# Allegro board s68_v10.brd
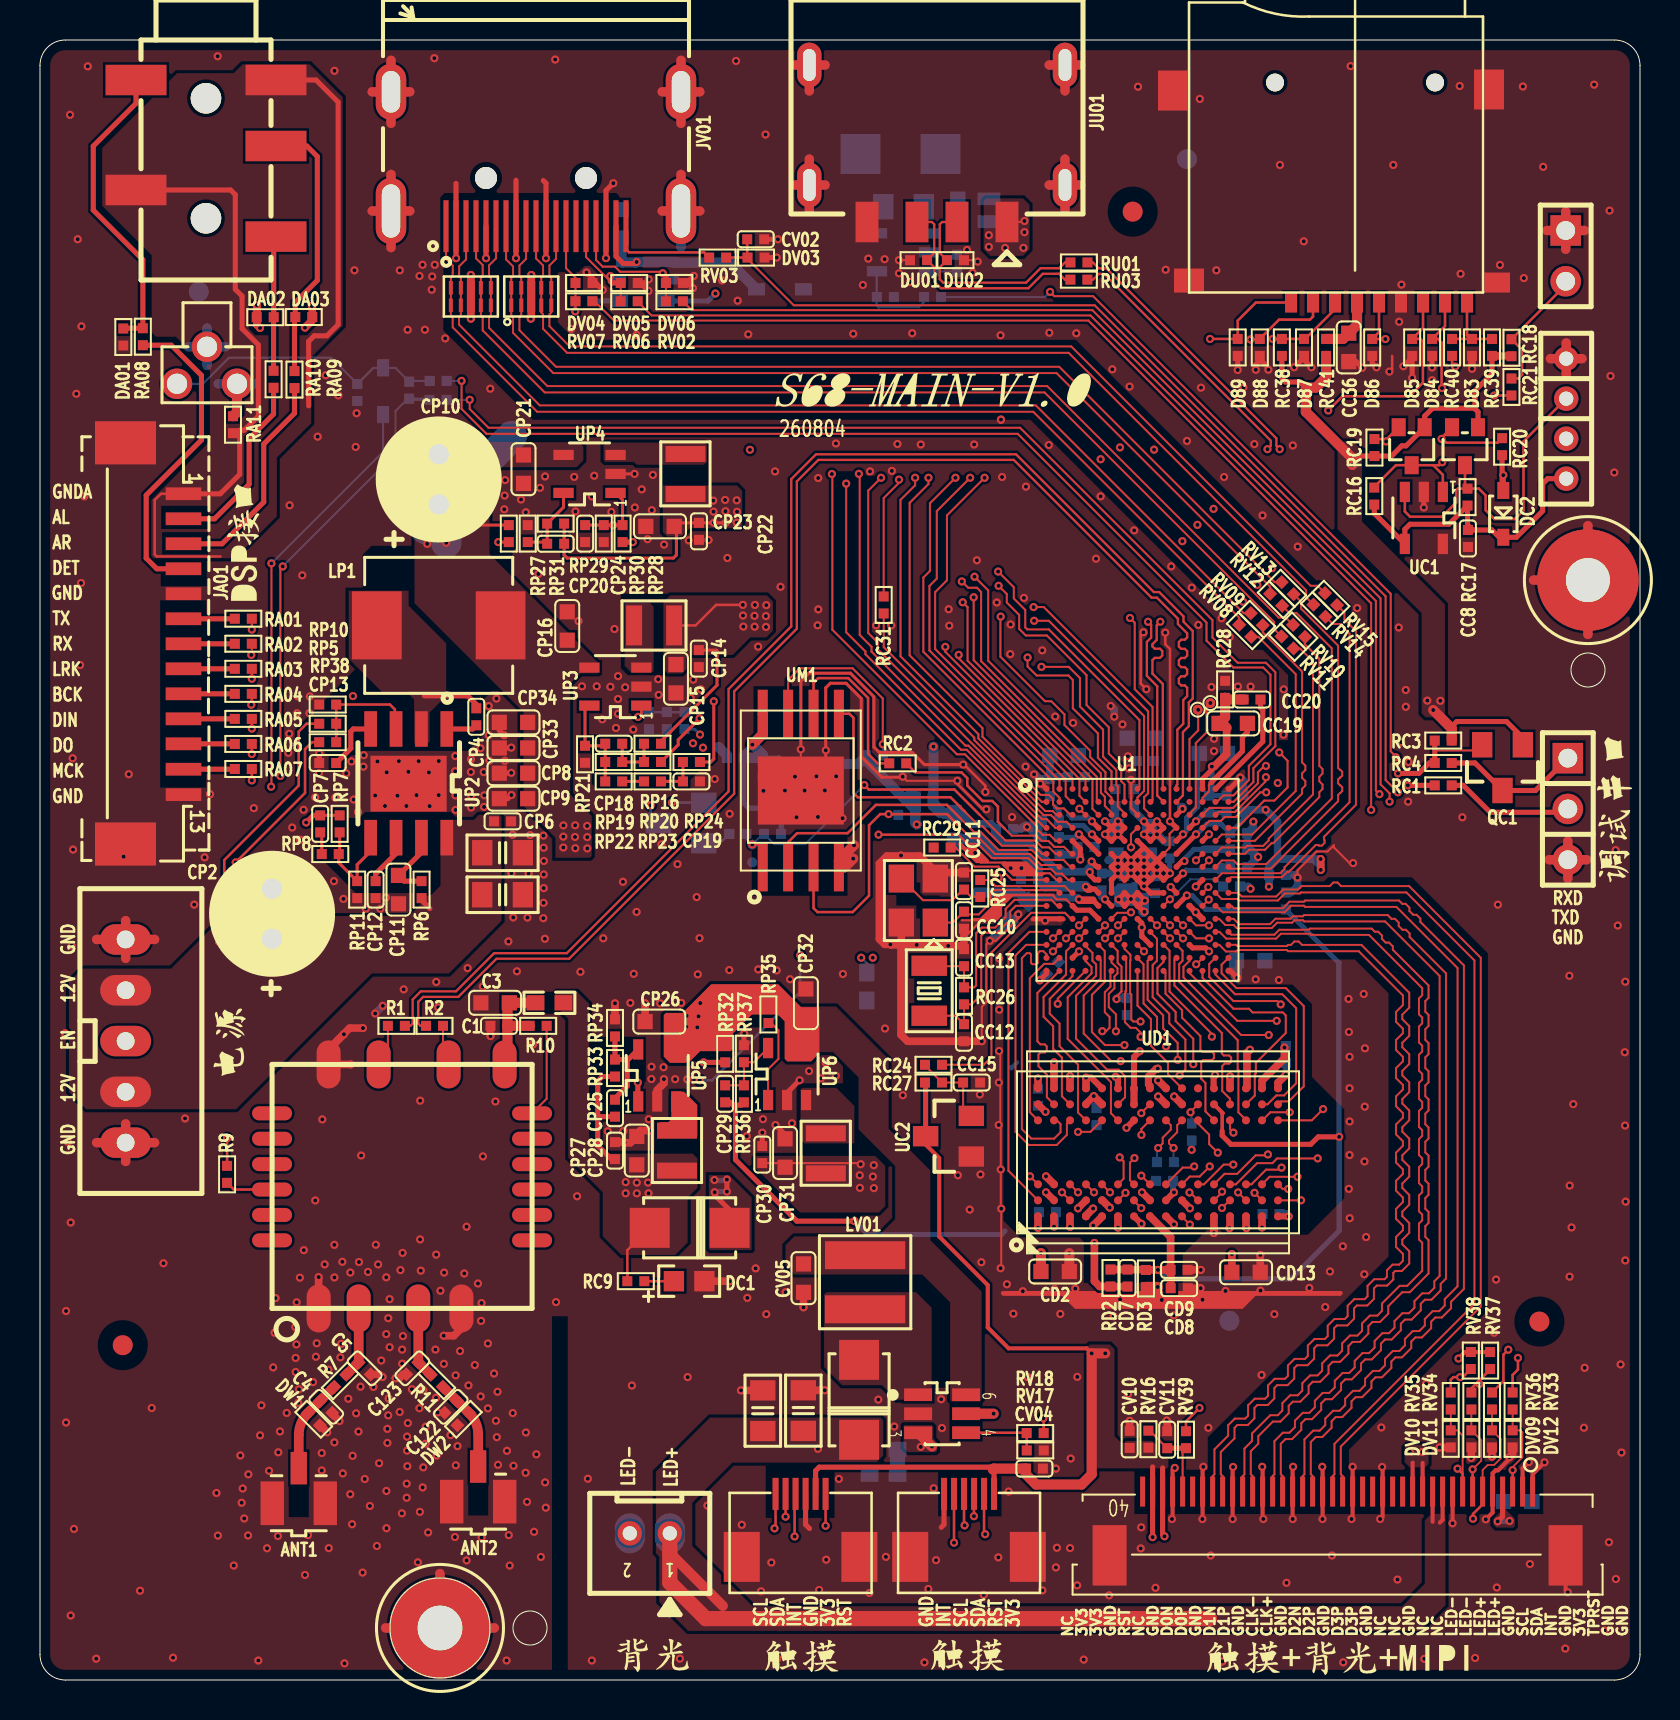
[diagram p0: board, top side]
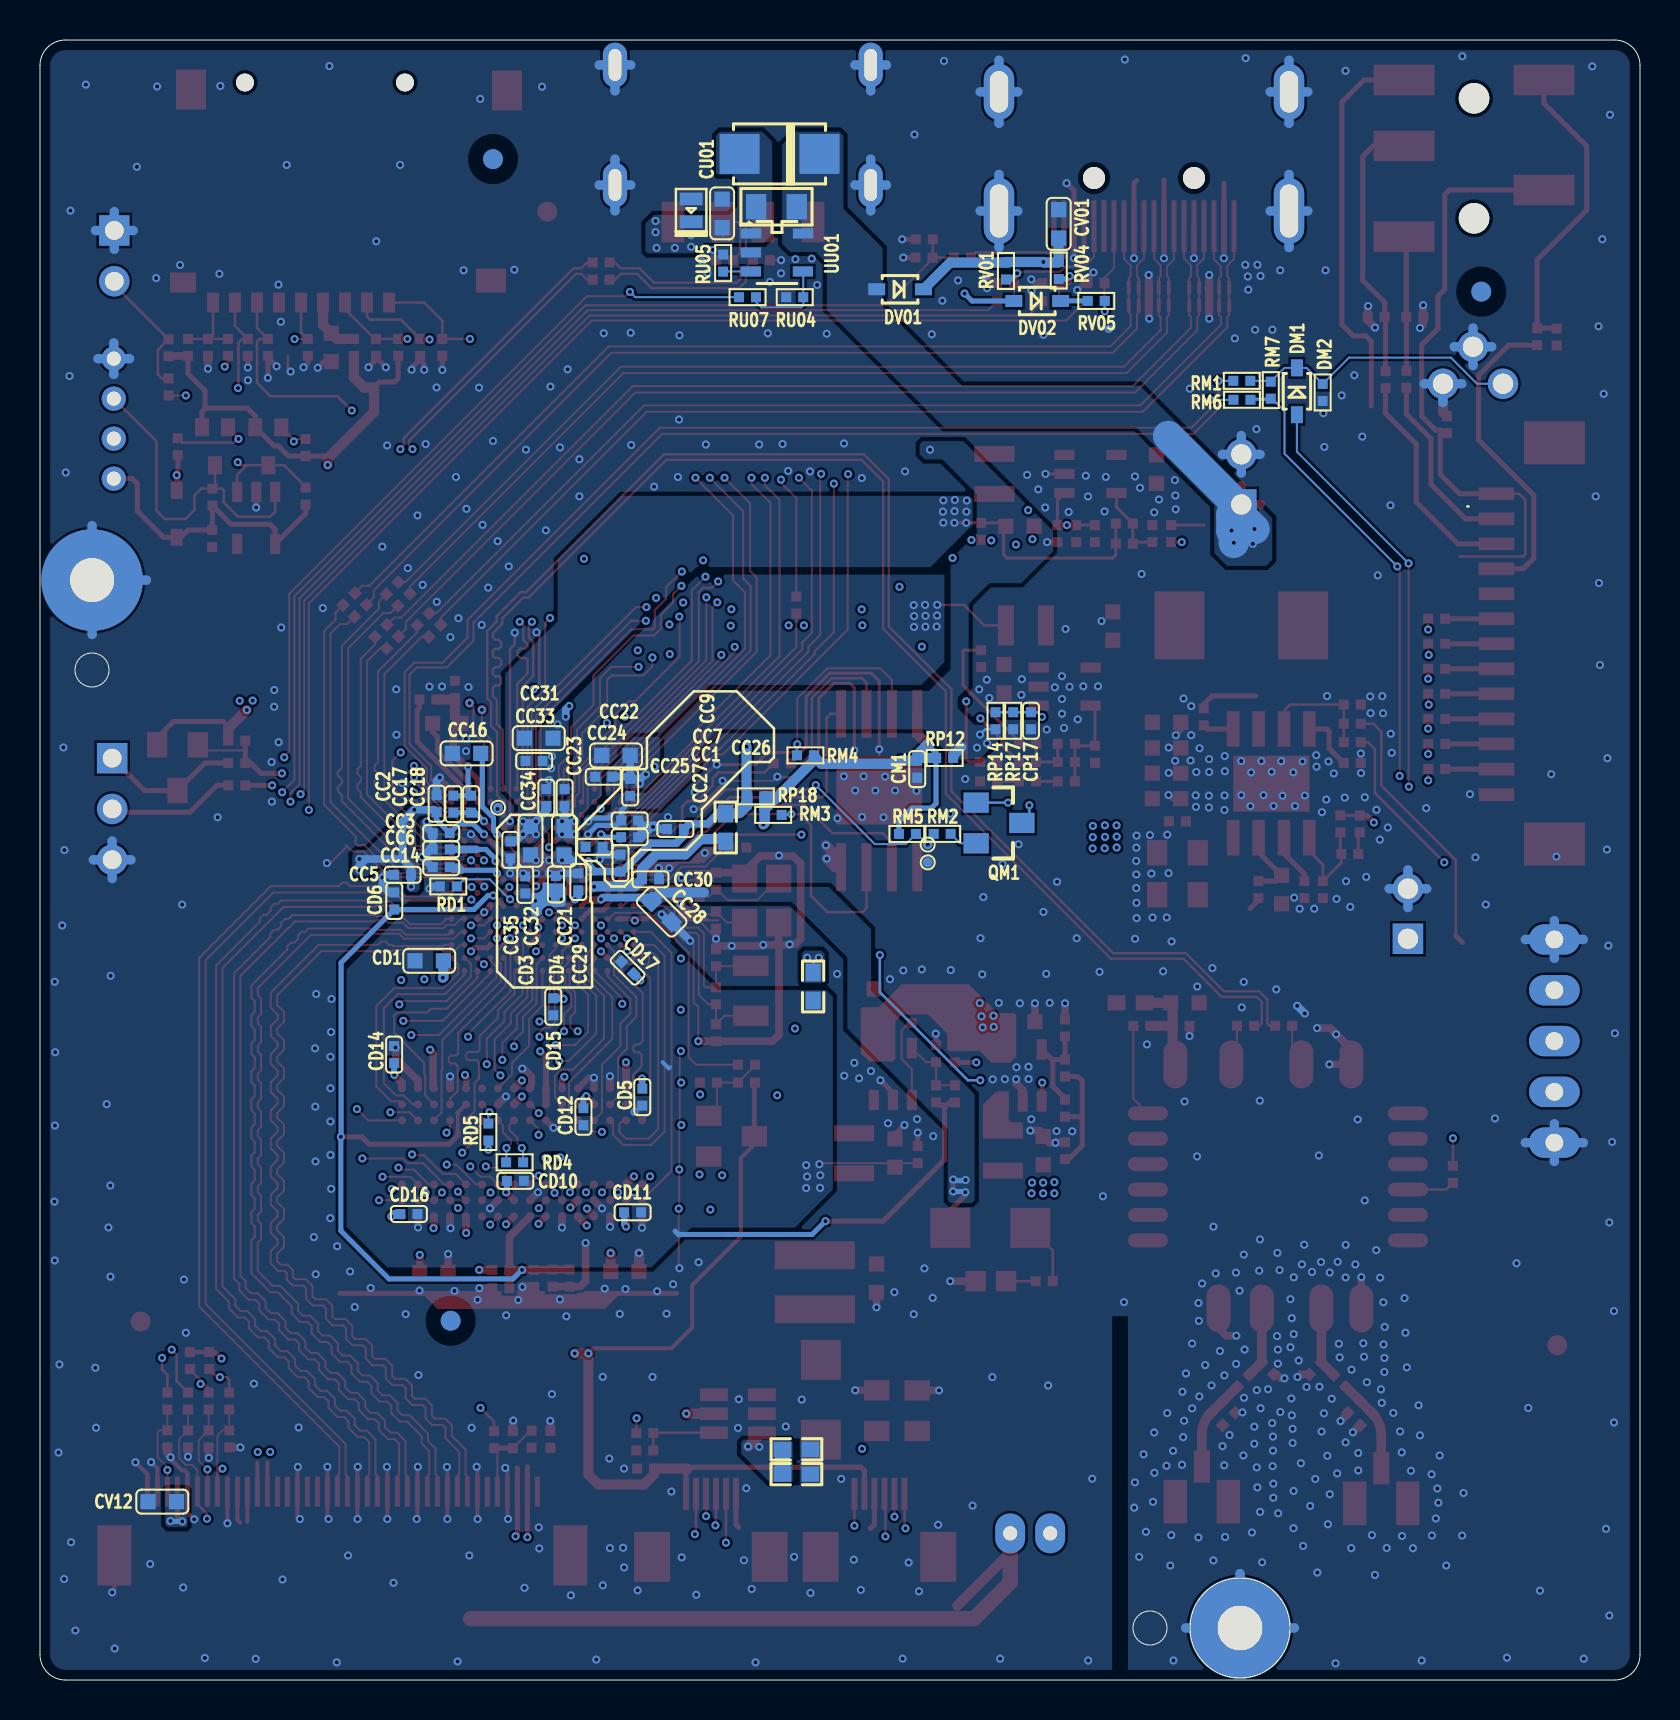
[diagram p1: board, bottom side, seen from below]

Outline 80 x 82 mm; copper layers: TOP, GND, VDD, BOTTOM. Coordinates in mm from the lower left corner of the outline.
Outline path: circle c20,2.6 r1.1 ; circle c20,2.6 r2.5 ; circle c24.5,2.6 r0.85 ; circle c77.4,50.5 r0.85 ; 0,80.73 0,1.27 arc(0.37,0.37) 1.27,0 78.73,0 arc(79.63,0.37) 80,1.27 80,80.73 arc(79.63,81.63) 78.73,82 1.27,82 arc(0.37,81.63) 0,80.73

## Design rules (mm)
net group HTX0N: nets HTX0N TX_D0N
net group HTX0P: nets HTX0P TX_D0P
net group HTX1N: nets HTX1N TX_D1N
net group HTX1P: nets HTX1P TX_D1P
net group HTX2N: nets HTX2N TX_D2N
net group HTX2P: nets HTX2P TX_D2P
net group HTXCN: nets HTXCN TX_CKN
net group HTXCP: nets HTXCP TX_CKP
net group PC2: nets PC2 SPI0-CLK
net group SCK: nets SCKN SCKP
net group SDC0-CLK: nets N23805182 SDC0-CLK
net group USB0-DM: nets USB0-DM USB_DM0_C
net group USB0-DP: nets USB0-DP USB_DP0_C
net group CMD-CLK-500MIL: nets SA0 SA1 SA2 SA3 SA4 SA5 SA6 SA7 SA8 SA9 SA10 SA11 SA12 SA13 SA14 SA15 SBA0 SBA1 SBA2 SCAS SRAS SWE
net group CS-CLK-300MIL: nets SCS0
net group DATA0-250MIL: nets SDQ0 SDQ1 SDQ2 SDQ3 SDQ4 SDQ5 SDQ6 SDQ7 SDQM0 SDQS0N SDQS0P
net group DATA1-250MIL: nets SDQ8 SDQ9 SDQ10 SDQ11 SDQ12 SDQ13 SDQ14 SDQ15 SDQM1 SDQS1N SDQS1P
net group EMMC: nets SPI0-CS0 SPI0-HOLD SPI0-MISO SPI0-MOSI SPI0-WP

## Placement (name value [footprint] x y rotation side)
ANT1  COX-3_A  [HSCOX-AMC-TM-A]  12.94 8.84 0 top
ANT2  COX-3_A  [HSCOX-AMC-TM-A]  21.91 8.92 0 top
C1  100nF  [C0402]  22.95 32.71 0 top
C3  10uF/10V  [C0603]  22.75 33.86 0 top
C4  NC  [C0402]  14.31 13.66 135 top
C5  NC  [C0402]  16.23 15.58 135 top
C122  NC  [C0402]  20.53 13.66 45 top
C123  NC  [C0402]  18.61 15.58 45 top
CC1  100nF  [C0402]  50.52 42.14 0 bottom
CC2  1uF/10V  [C0402]  60.17 43.82 270 bottom
CC3  100nF  [C0402]  59.94 42.34 180 bottom
CC5  100nF  [C0402]  61.87 40.26 180 bottom
CC6  100nF  [C0402]  59.94 41.53 180 bottom
CC7  100nF  [C0402]  50.52 42.98 180 bottom
CC8  100nF  [C0402]  71.4 57.08 90 top
CC9  100nF  [C0402]  50.49 44.63 90 bottom
CC10  18pF  [C0402]  46.2 37.99 270 top
CC11  18pF  [C0402]  46.2 39.95 90 top
CC12  22pF  [C0402]  46.2 32.36 270 top
CC13  22pF  [C0402]  46.2 36.11 90 top
CC14  100nF  [C0402]  59.94 40.64 0 bottom
CC15  1nF  [C0402]  46.58 29.87 0 top
CC16  10uF/10V  [C0603]  58.67 46.33 0 bottom
CC17  2.2uF/6.3V  [C0402]  59.33 43.79 90 bottom
CC18  NC  [C0402]  58.44 43.79 90 bottom
CC19  10uF/10V  [C0603]  59.66 47.83 180 top
CC20  470nF  [C0402]  60.6 49.02 180 top
CC21  10uF/10V  [C0603]  53.8 41.96 90 bottom
CC22  NC 10uF/10V  [C0603]  51.2 46.23 0 bottom
CC23  2.2uF/6.3V  [C0402]  53.77 44.12 270 bottom
CC24  2.2nF  [C0402]  51.81 45.16 0 bottom
CC25  2.2uF/6.3V  [C0402]  52.3 41.66 0 bottom
CC26  100nF  [C0402]  48.23 42.55 180 bottom
CC27  100nF  [C0402]  50.97 40.85 90 bottom
CC28  10uF/10V  [C0603]  48.92 38.41 225 bottom
CC29  2.2uF/6.3V  [C0402]  53.08 39.91 90 bottom
CC30  2.2uF/6.3V  [C0402]  49.48 40.03 180 bottom
CC31  10uF/10V  [C0603]  55.06 47.09 0 bottom
CC32  10uF/10V  [C0603]  55.48 41.96 90 bottom
CC33  100nF  [C0402]  55.29 45.95 0 bottom
CC34  2.2uF/6.3V  [C0402]  54.69 44.12 270 bottom
CC35  2.2uF/6.3V  [C0402]  56.48 41.51 90 bottom
CC36  10uF/10V  [C0603]  65.44 66.63 90 top
CD1  10uF/10V  [C0603]  60.54 35.96 0 bottom
CD2  NC 10uF/10V  [C0603]  50.76 20.42 180 top
CD3  2.2nF  [C0402]  55.74 39.76 270 bottom
CD4  2.2uF/6.3V  [C0402]  54.21 39.78 270 bottom
CD5  2.2uF/6.3V  [C0402]  49.88 29.14 270 bottom
CD6  100nF  [C0402]  62.28 38.95 270 bottom
CD7  NC  [C0402]  54.38 20.1 270 top
CD8  100nF  [C0402]  56.96 19.59 180 top
CD9  100nF  [C0402]  56.95 20.51 180 top
CD10  100nF  [C0402]  56.23 24.96 180 bottom
CD11  1uF/10V  [C0402]  50.37 23.38 180 bottom
CD12  100nF  [C0402]  52.83 28.16 270 bottom
CD13  10uF/10V  [C0603]  60.3 20.39 180 top
CD14  1uF/10V  [C0402]  62.29 31.27 90 bottom
CD15  100nF  [C0402]  54.33 33.66 270 bottom
CD16  100nF  [C0402]  61.56 23.3 180 bottom
CD17  100nF  [C0402]  50.62 35.61 45 bottom
CM1  100nF  [C0402]  36.14 45.54 90 bottom
CP1  NC 10uF/25V  [C0805]  23.13 39.26 0 top
CP2  220uF/25V  [CAP-RAD-6D3X11-2D5]  11.6 37.06 90 top
CP4  100nF  [C0402]  21.82 48.16 270 top
CP5  10uF/25V  [C0805]  23.13 41.36 0 top
CP6  100nF  [C0402]  23.13 42.93 180 top
CP7  6.8nF  [C0402]  14.01 42.81 90 top
CP8  10uF/10V  [C0603]  23.67 45.34 180 top
CP9  10uF/10V  [C0603]  23.67 44.06 180 top
CP10  470uF/10V  [CAP-RAD-6D3X11-2D5]  19.94 58.78 90 top
CP11  1uF/25V  [C0603]  17.92 39.52 90 top
CP12  1uF/10V  [C0402]  16.78 39.52 90 top
CP13  100nF  [C0402]  14.39 45.85 0 top
CP14  100nF  [C0402]  32.94 51.07 270 top
CP15  10uF/10V  [C0603]  31.8 50.06 270 top
CP16  10uF/10V  [C0603]  26.36 52.7 90 top
CP17  100nF  [C0402]  30.45 47.96 270 bottom
CP18  20pF  [C0402]  28.69 46.81 0 top
CP19  100nF  [C0402]  32.57 44.93 0 top
CP20  20pF  [C0402]  25.78 56.81 0 top
CP21  10uF/10V  [C0603]  24.17 60.54 270 top
CP22  100nF  [C0402]  32.95 57.43 270 top
CP23  10uF/10V  [C0603]  31 57.68 180 top
CP24  100nF  [C0402]  27.26 57.32 270 top
CP25  20pF  [C0402]  28.75 28.59 270 top
CP26  10uF/10V  [C0603]  30.96 32.92 180 top
CP27  100nF  [C0402]  28.75 26.47 90 top
CP28  10uF/10V  [C0603]  29.84 26.47 90 top
CP29  20pF  [C0402]  34.26 29.31 270 top
CP30  100nF  [C0402]  36.11 26.27 90 top
CP31  10uF/10V  [C0603]  37.25 26.35 90 top
CP32  10uF/10V  [C0603]  38.29 33.84 90 top
CP33  NC 10uF/10V  [C0603]  23.67 46.6 180 top
CP34  NC 10uF/10V  [C0603]  23.67 47.88 180 top
CU01  10uF/10V  [C0603]  45.89 73.33 90 bottom
CV01  10uF/10V  [C0603]  29.07 72.81 90 bottom
CV02  100nF  [C0402]  35.79 72.04 0 top
CV04  100nF  [C0402]  49.72 10.57 180 top
CV05  10uF/10V  [C0603]  38.18 20.09 270 top
CV06  2.2uF/50V  [C0805]  36.14 13.46 90 top
CV07  NC 2.2uF/50V  [C0805]  38.17 13.47 90 top
CV10  1uF/10V  [C0402]  54.48 12.03 90 top
CV11  100nF  [C0402]  56.36 12.02 90 top
CV12  NC 10uF/6.3V  [C0603]  73.89 8.92 0 bottom
D83  TPD1E05U06  [ESD0402]  71.6 66.63 270 top
D84  TPD1E05U06  [ESD0402]  69.61 66.63 270 top
D85  TPD1E05U06  [ESD0402]  68.61 66.63 270 top
D86  TPD1E05U06  [ESD0402]  66.61 66.63 270 top
D87  TPD1E05U06  [ESD0402]  63.2 66.63 270 top
D88  TPD1E05U06  [ESD0402]  60.99 66.63 270 top
D89  TPD1E05U06  [ESD0402]  59.88 66.63 270 top
D134  SS14  [DO-214AC]  40.95 14.01 270 top
DA01  CLAMP0521P  [ESD0402]  4.16 67.15 270 top
DA02  CLAMP0521P  [ESD0402]  11.26 68.14 180 top
DA03  CLAMP0521P  [ESD0402]  13.19 68.15 0 top
DC1  GRN LED  [LED0603]  31.7 19.94 0 top
DC2  B5819WS  [SOD_323]  73.17 58.31 270 top
DM1  B5819WS  [SOD_323]  17.15 64.44 90 bottom
DM2  NC CLAMP0521P  [ESD0402]  15.87 64.38 270 bottom
DP1  SS14  [DO-214AC]  43.02 76.3 180 bottom
DP2  1N4001  [DO-214AC]  32.48 22.61 0 top
DU01  CLAMP0521P  [ESD0402]  43.93 70.99 180 top
DU02  CLAMP0521P  [ESD0402]  45.77 70.99 0 top
DU07  WPE5V0N16AT1L1  [DFN1610-2L]  47.44 73.48 90 bottom
DV01  B5819WS  [SOD_323]  37 69.53 180 bottom
DV02  B5819WS  [SOD_323]  30.14 68.95 180 bottom
DV03  NC CLAMP0521P  [ESD0402]  35.8 71.12 0 top
DV04  NC CLAMP0521P  [ESD0402]  27.2 69.85 0 top
DV05  NC CLAMP0521P  [ESD0402]  29.46 69.85 0 top
DV06  NC CLAMP0521P  [ESD0402]  31.72 69.85 0 top
DV07  NC CLAMP3324PN  [DFN2510P10]  21.54 69.17 0 top
DV08  NC CLAMP3324PN  [DFN2510P10]  24.56 69.17 0 top
DV09  NC CLAMP0521P  [ESD0402]  72.6 12.06 270 top
DV10  NC CLAMP0521P  [ESD0402]  70.54 12.06 270 top
DV11  NC CLAMP0521P  [ESD0402]  71.57 12.06 270 top
DV12  NC CLAMP0521P  [ESD0402]  73.63 12.06 270 top
DW1  CLAMP0521P  [ESD0402]  13.69 13.04 315 top
DW2  CLAMP0521P  [ESD0402]  21.17 13.04 225 top
J50  TF  [T-FLASH-A]  57.45 69.37 0 top
JA01  -  [A1251WRA-S-13P]  7.17 59.31 270 top
JA02  LF-313  [PJ-327F]  8.3 76.09 0 top
JC1  NC SIP3  [SIP3]  76.39 43.55 270 top
JC4  NC SIP4  [SIP4_2D0]  76.31 62.07 90 top
JC5  NC XH-02A  [SIP2]  76.29 72.48 270 top
JP1  CON5  [XH-05A]  4.28 34.49 270 top
JU01  USB-SMD-4MNT  [USB_A_SMT_4MNT]  48.35 72.9 180 top
JV01  WLDM-068E  [WBC0119-20R-A]  34.96 88.01 180 top
JV02  FPC-40  [FPC40_PT05_H2B]  64.88 9.28 180 top
JV03  NC PH-02A  [PH-02A]  31.49 7.33 180 top
JV04  NC AFC24-S06FIA-00  [FPC6R_1X6_0R50_DUALCN]  54.95 6.46 180 top
JV05  NC AFC24-S06FIA-00  [FPC6R_1X6_0R50_DUALCN]  46.53 6.46 180 top
K1  TS-1109G  [MINI-DIP-KEY-H]  8.35 64.81 180 top
LP1  SCCB0630-4R7M  [SPL0707G]  19.94 52.73 0 top
LP2  SKFB252010-2R2M  [L2520]  30.71 52.73 0 top
LP3  SKFB252010-2R2M  [L2520]  32.27 60.3 270 top
LP4  SKFB252010-2R2M  [L2520]  31.85 26.47 270 top
LP5  SKFB252010-2R2M  [L2520]  39.29 26.33 270 top
LV01  MWSA0402-100MT  [SPL0404B]  41.26 19.89 270 top
M1  Mark  [MARK]  4.14 16.74 0 top
M2  Mark  [MARK]  54.63 73.42 0 top
M3  Mark  [MARK]  74.97 17.92 0 top
M4  Mark  [MARK]  7.94 69.42 180 bottom
M5  Mark  [MARK]  59.47 17.96 180 bottom
M6  Mark  [MARK]  57.35 76.04 180 bottom
NOREF  -  []  6.57 0 90 top
NOREF#2  -  []  49.65 212.18 0 top
NOREF#3  -  []  30.62 1.25 0 top
NOREF#4  -  []  10.21 57.23 90 top
NOREF#5  -  []  44.52 64.51 0 top
NOREF#6  -  []  46.36 1.21 0 top
NOREF#7  -  []  8.19 30.43 90 top
NOREF#8  -  []  64.83 1.09 0 top
NOREF#9  -  []  0 3.02 0 top
NOREF#10  -  []  38.06 1.15 0 top
NOREF#11  -  []  82.91 40.04 0 top
NOREF#12  -  []  37.9 155.15 0 top
QC1  NC BSN20  [SOT23]  73.13 45.62 180 top
QC4  2SK3018  [SOT_323]  68.58 61.69 180 top
QC5  2SK3018  [SOT_323]  71.25 61.69 180 top
QM1  WPM2341  [SOT23]  32.05 42.85 270 bottom
R1  0R  [R0402]  17.82 32.71 0 top
R2  0R  [R0402]  19.73 32.71 180 top
R7  0R  [R0402]  15.01 14.96 45 top
R9  NC  [R0402]  9.35 25.28 90 top
R10  10K  [R0402]  24.91 32.71 180 top
R11  0R  [R0402]  19.84 14.96 135 top
RA01  33R  [R0402]  10.17 53.06 0 top
RA02  33R  [R0402]  10.17 51.81 0 top
RA03  33R  [R0402]  10.17 50.56 0 top
RA04  33R  [R0402]  10.17 49.31 0 top
RA05  33R  [R0402]  10.17 48.06 0 top
RA06  33R  [R0402]  10.17 46.8 0 top
RA07  33R  [R0402]  10.17 45.55 0 top
RA08  10K  [R0402]  5.14 67.16 90 top
RA09  100R  [R0402]  12.72 65.02 90 top
RA10  100R  [R0402]  11.68 65.04 90 top
RA11  0R  [R0402]  9.65 62.77 90 top
RC1  1K  [R0402]  70.16 44.73 0 top
RC2  33R  [R0402]  42.89 45.83 180 top
RC3  NC 10K  [R0402]  70.16 46.97 180 top
RC4  1K  [R0402]  70.16 45.85 0 top
RC9  1K  [R0402]  29.79 19.94 0 top
RC16  4.7K  [R0402]  66.71 59.2 270 top
RC17  4.7K  [R0402]  71.38 59.14 90 top
RC18  4.7K  [R0402]  73.58 66.61 90 top
RC19  2.2K  [R0402]  66.72 61.62 270 top
RC20  33R  [R0402]  73.11 61.67 270 top
RC21  1K  [R0402]  73.57 64.65 270 top
RC24  0R  [R0402]  44.68 30.76 0 top
RC25  0R  [R0402]  47.01 39.58 270 top
RC26  10M  [R0402]  46.2 34.21 90 top
RC27  47K  [R0402]  44.68 29.87 0 top
RC28  0R  [R0402]  59.25 49.53 270 top
RC29  0R  [R0402]  45.11 41.62 0 top
RC31  33R  [R0402]  42.18 53.75 90 top
RC38  47K  [R0402]  62.09 66.63 90 top
RC39  47K  [R0402]  72.6 66.63 90 top
RC40  1K  [R0402]  70.6 66.63 90 top
RC41  2.2R  [R0402]  64.3 66.63 90 top
RD1  240R/F  [R0402]  59.58 39.68 180 bottom
RD2  NC  [R0402]  53.53 20.1 270 top
RD3  NC  [R0402]  55.3 20.08 90 top
RD4  100R  [R0402]  56.27 25.88 0 bottom
RD5  240R/F  [R0402]  57.58 27.4 90 bottom
RM1  1K  [R0402]  19.91 64.96 0 bottom
RM2  0R  [R0402]  34.89 42.31 180 bottom
RM3  10K  [R0402]  43.34 43.26 180 bottom
RM4  10K  [R0402]  41.73 46.23 0 bottom
RM5  10K  [R0402]  36.63 42.3 180 bottom
RM6  0R  [R0402]  19.9 64.01 180 bottom
RM7  1K  [R0402]  18.46 64.49 90 bottom
RP5  NC 100K  [R0402]  14.39 47.81 0 top
RP6  33R  [R0402]  19.08 39.52 90 top
RP7  115K/F  [R0402]  14.98 42.81 90 top
RP8  1K  [R0402]  14.51 41.3 0 top
RP9  NC  [R0603]  41.34 34.68 270 bottom
RP10  47K  [R0402]  14.39 48.77 180 top
RP11  15K/F  [R0402]  15.86 39.52 90 top
RP12  0R  [R0402]  34.77 46.1 0 bottom
RP13  0R  [R0603]  45.72 42.62 270 bottom
RP14  100K  [R0402]  32.22 47.96 270 bottom
RP16  NC 0R  [R0402]  30.62 46.81 180 top
RP17  100K  [R0402]  31.34 47.96 270 bottom
RP18  NC  [R0402]  44.21 44.18 180 bottom
RP19  13K/F  [R0402]  28.69 45.9 180 top
RP20  0R  [R0402]  30.62 45.9 180 top
RP21  18K/F  [R0402]  27.25 46.29 270 top
RP22  130K/F  [R0402]  28.69 44.93 180 top
RP23  0R  [R0402]  30.62 44.93 180 top
RP24  13K/F  [R0402]  32.57 45.9 180 top
RP26  0R  [R0603]  25.47 33.86 180 top
RP27  NC 100K  [R0402]  23.44 57.32 270 top
RP28  100K  [R0402]  29.13 57.32 270 top
RP29  12K/F  [R0402]  25.78 57.82 180 top
RP30  100K  [R0402]  28.19 57.32 270 top
RP31  20K/F  [R0402]  24.39 57.32 90 top
RP32  100K  [R0402]  34.26 31.31 90 top
RP33  91K/F  [R0402]  28.75 30.6 90 top
RP34  20K/F  [R0402]  28.75 32.6 270 top
RP35  100K  [R0402]  36.42 33.28 90 top
RP36  30K/F  [R0402]  35.2 29.31 90 top
RP37  20K/F  [R0402]  35.2 31.31 270 top
RP38  100K  [R0402]  14.39 46.89 0 top
RU01  2.2R  [R0402]  51.95 70.88 180 top
RU03  2.2R  [R0402]  51.94 70.02 0 top
RU04  47K  [R0402]  42.26 69.14 180 bottom
RU05  3.6K  [R0402]  45.84 70.84 90 bottom
RU07  100R  [R0402]  44.62 69.14 180 bottom
RU16  NC 0R  [R0805]  43.18 73.66 0 bottom
RV01  2K  [R0402]  31.7 70.45 90 bottom
RV02  47R  [R0402]  31.72 68.94 180 top
RV03  10K  [R0402]  33.88 71.12 180 top
RV04  2K  [R0402]  29.06 70.47 90 bottom
RV05  27K  [R0402]  27.19 68.96 0 bottom
RV06  47R  [R0402]  29.46 68.94 0 top
RV07  47R  [R0402]  27.2 68.94 180 top
RV08  2.2R  [R0402]  60.26 52.46 135 top
RV09  2.2R  [R0402]  60.84 53.04 135 top
RV10  2.2R  [R0402]  62.95 52.46 135 top
RV11  2.2R  [R0402]  62.38 51.88 135 top
RV12  2.2R  [R0402]  61.81 54.01 135 top
RV13  2.2R  [R0402]  62.38 54.59 135 top
RV14  2.2R  [R0402]  63.97 53.47 135 top
RV15  2.2R  [R0402]  64.55 54.04 135 top
RV16  NC 100R  [R0402]  55.42 12.04 270 top
RV17  10K  [R0402]  49.76 11.48 180 top
RV18  1K  [R0402]  49.76 12.35 180 top
RV19  NC 2.2R  [R0603]  42.18 10.29 180 bottom
RV20  2.2R  [R0603]  42.18 11.53 180 bottom
RV33  47R  [R0402]  73.63 13.95 270 top
RV34  47R  [R0402]  71.57 13.95 270 top
RV35  47R  [R0402]  70.54 13.95 270 top
RV36  47R  [R0402]  72.6 13.95 270 top
RV37  2K  [R0402]  72.51 15.97 270 top
RV38  2K  [R0402]  71.54 15.97 270 top
RV39  NC 100R  [R0402]  57.3 12.02 90 top
TH1  TESTPOINT  [THO-5D0-2D2D]  20 2.6 0 top
TH2  TESTPOINT  [THO-5D0-2D2D]  77.4 55 0 top
TP1  test  [TP_0R50]  35.61 41.77 180 bottom
TP2  test  [TP_0R50]  35.61 40.88 0 bottom
TP3  test  [TP_0R50]  58.52 48.85 0 top
TP4  test  [TP_0R50]  57.88 48.52 0 top
TP5  test  [TP_0R50]  57.1 43.61 180 bottom
U1  H133-BGA196  [BGA196P65B1000_1000H117]  54.87 40.01 0 top
UC1  BL24C02F  [SOT23-5]  69.19 58.1 180 top
UC2  MAX809S  [SOT23]  45.42 27.19 90 top
UD1  value  [BGA96P80B1000_1400H120]  55.9 26.38 90 top
UM1  NC SPI-NAND-OR-NOR  [SPI-9P-NAND-OR-NOR]  38.04 44.47 90 top
UP2  SY8204  [SOP8H-50-155]  18.44 44.83 180 top
UP3  RY3408/SY8088AAC  [SOT23-5]  28.77 49.67 90 top
UP4  RY3408/SY8088AAC  [SOT23-5]  27.48 60.31 90 top
UP5  RY3420/SY8089AAAC  [SOT23-5]  30.86 30.23 0 top
UP6  RY3408/SY8088AAC  [SOT23-5]  37.35 30.3 0 top
UU01  SY6280  [SOT23-5]  43.15 71.38 270 bottom
UV01  SY7200AABC  [SOT23_6]  45.1 13.31 270 top
UW1  CDW.B1800D4  [USB-WIFI]  17.98 24.55 90 top
YC1  24M-16pF-10ppm  [X3225]  43.92 38.97 90 top
YC2  NC 32.768K-12.5pF-20ppm  [FC-135]  44.46 34.46 90 top

## Library data of the parts
ANT1 ANT2 = CRYSTAL-4_0
C1 C3-C5 C122 C123 CC16-CC18 CP14-CP32 = C-C0603
CC1-CC3 CC5-CC7 CC9-CC15 CC19-CC36 CD1-CD17 CM1 = C-C0402
CC8 = C_0
CP1 CP4-CP9 CP11-CP13 CP33 CP34 CV04 = CAP NP
CP2 CP10 = CAP POL
CU01 = C
CV01 CV02 = CAP_NP
CV05 CV06 CV07 CV10-CV12 = CAP NP_1
D83-D89 DA01 DA02 DA03 DU01 DU02 DV03 DV04 DV05 DV06 DV09-DV12 = DIODE_1
D134 DC2 DP1 = DIODE
DC1 = LED
DM1 DP2 = DIO-M1
DM2 DW1 DW2 = ESD9B5VL
DU07 = DIODE ZENER1
DV01 DV02 = D_A_1
DV07 DV08 = RClamp0544T_0
J50 = T_FLASH_A
JA01 = A1251WRA-S-13P
JA02 = PHONOJACK STEREO-15_2
JC1 = HEADER 3
JC4 = SIP4
JC5 JV03 = CON2
JP1 = CON5
JU01 = USB3-MICRO-B_1
JV01 = WBC1X19S4M2_1
JV02 = FPC-40_0: Tolerance: TOLERANCE; User Part Number: PRAT NUMBER
JV04 = HEADER 6_11
JV05 = HEADER 6_12
K1 = KEYB_0
LP1 = INDUCTOR_0
LP2-LP5 = L-L2520
LV01 = INDUCTORS OF FERRITE
M1-M6 = Testpin
QC1 = NMOS-BSN20
QC4 QC5 = NMOS_0
QM1 = PMOS-AO3423
R1 R2 = R-R0603-1%_2
R7 R9-R11 RP9 RP12 RP13 RP18 RP26 = R-R0603-1%
RA01 RA02 RA03 RA04 RA05 RA06 RA07 RA11 RC17 RU04 RU05 RU07 RU16 = R0603_0
RA08 RA09 RA10 RC4 RC16 RC18 RC21 RP5-RP8 RP10 RP11 RP38 RV03 RV33-RV38 = R
RC1 RC3 RC40 RC41 = R-R0805-5%
RC2 RC9 RC19 RC20 RC24 RC25 RC27-RC29 RM1-RM7 RP14 RP16 RP17 RP19-RP24 RP27-RP37 = R-R0402-5%
RC26 RD1-RD5 = R-R0402-1%
RC31 = R-R0402-5%: signal model: R-R0402-5%_R0402_33R_33R
RC38 RC39 = R_0
RU01 RU03 = R0603_0: signal model: 33R
RV01 RV02 RV04 RV05 RV06 RV07 = RESISTOR
RV08 RV09-RV15 = RESISTOR_0: signal model: 33R
RV16 = R_R1
RV17-RV20 = RESISTOR_2
RV39 = RESISTOR_1
TH1 TH2 = TESTPOINT
TP1-TP5 = TestPoint-SMD
U1 = H133-BGA196
UC1 = 24CXX_0
UC2 = SGM803/809
UD1 = DDR3-FBGA96
UM1 = SPI-NAND+NOR
UP2 = RT6206BHGSP_0
UP3 UP4 = SY8089A_0
UP5 UP6 = SY8088_0
UU01 = SY6280
UV01 = SY7201
UW1 = FN-link 6111E-UC_0
YC1 = CRY-24MHz-3225-SMD_0
YC2 = CRY-32.768KHz-3215-2P-SMD

## Footprints (pads in the part's own frame, mm; a bottom-side part is the same pattern mirrored in y, then rotated)
A1251WRA-S-13P
  rect 0.635x1.778 smd: 1(0,0) 2(1.25,0) 3(2.5,0) 4(3.75,0) 5(4.999,0) 6(6.25,0) 7(7.501,0) 8(8.751,0) 9(10.002,0) 10(11.253,0) 11(12.503,0) 12(13.773,0) 13(15.043,0)
  rect 2.159x3.048 smd: 14(17.513,-2.9) 15(-2.55,-2.9)
BGA96P80B1000_1400H120
  round 0.4 smd: A1(-3.2,6) A2(-2.4,6) A3(-1.6,6) A7(1.6,6) A8(2.4,6) A9(3.2,6) B1(-3.2,5.2) B2(-2.4,5.2) B3(-1.6,5.2) B7(1.6,5.2) B8(2.4,5.2) B9(3.2,5.2) C1(-3.2,4.4) C2(-2.4,4.4) C3(-1.6,4.4) C7(1.6,4.4) C8(2.4,4.4) C9(3.2,4.4) D1(-3.2,3.6) D2(-2.4,3.6) D3(-1.6,3.6) D7(1.6,3.6) D8(2.4,3.6) D9(3.2,3.6) E1(-3.2,2.8) E2(-2.4,2.8) E3(-1.6,2.8) E7(1.6,2.8) E8(2.4,2.8) E9(3.2,2.8) F1(-3.2,2) F2(-2.4,2) F3(-1.6,2) F7(1.6,2) F8(2.4,2) F9(3.2,2) G1(-3.2,1.2) G2(-2.4,1.2) G3(-1.6,1.2) G7(1.6,1.2) G8(2.4,1.2) G9(3.2,1.2) H1(-3.2,0.4) H2(-2.4,0.4) H3(-1.6,0.4) H7(1.6,0.4) H8(2.4,0.4) H9(3.2,0.4) J1(-3.2,-0.4) J2(-2.4,-0.4) J3(-1.6,-0.4) J7(1.6,-0.4) J8(2.4,-0.4) J9(3.2,-0.4) K1(-3.2,-1.2) K2(-2.4,-1.2) K3(-1.6,-1.2) K7(1.6,-1.2) K8(2.4,-1.2) K9(3.2,-1.2) L1(-3.2,-2) L2(-2.4,-2) L3(-1.6,-2) L7(1.6,-2) L8(2.4,-2) L9(3.2,-2) M1(-3.2,-2.8) M2(-2.4,-2.8) M3(-1.6,-2.8) M7(1.6,-2.8) M8(2.4,-2.8) M9(3.2,-2.8) N1(-3.2,-3.6) N2(-2.4,-3.6) N3(-1.6,-3.6) N7(1.6,-3.6) N8(2.4,-3.6) N9(3.2,-3.6) P1(-3.2,-4.4) P2(-2.4,-4.4) P3(-1.6,-4.4) P7(1.6,-4.4) P8(2.4,-4.4) P9(3.2,-4.4) R1(-3.2,-5.2) R2(-2.4,-5.2) R3(-1.6,-5.2) R7(1.6,-5.2) R8(2.4,-5.2) R9(3.2,-5.2) T1(-3.2,-6) T2(-2.4,-6) T3(-1.6,-6) T7(1.6,-6) T8(2.4,-6) T9(3.2,-6)
BGA196P65B1000_1000H117
  round 0.3 smd: A1(-4.55,4.55) A2(-3.9,4.55) A3(-3.25,4.55) A4(-2.6,4.55) A6(-1.3,4.55) A8(0,4.55) A10(1.3,4.55) A11(1.95,4.55) A12(2.6,4.55) A13(3.25,4.55) A14(3.9,4.55) A15(4.55,4.55) B1(-4.55,3.9) B2(-3.9,3.9) B3(-3.25,3.9) B4(-2.6,3.9) B5(-1.95,3.9) B6(-1.3,3.9) B7(-0.65,3.9) B8(0,3.9) B9(0.65,3.9) B10(1.3,3.9) B11(1.95,3.9) B12(2.6,3.9) B13(3.25,3.9) B14(3.9,3.9) B15(4.55,3.9) C2(-3.9,3.25) C3(-3.25,3.25) C4(-2.6,3.25) C5(-1.95,3.25) C6(-1.3,3.25) C7(-0.65,3.25) C8(0,3.25) C9(0.65,3.25) C10(1.3,3.25) C11(1.95,3.25) C12(2.6,3.25) C13(3.25,3.25) C14(3.9,3.25) D1(-4.55,2.6) D2(-3.9,2.6) D3(-3.25,2.6) D5(-1.95,2.6) D6(-1.3,2.6) D7(-0.65,2.6) D8(0,2.6) D9(0.65,2.6) D10(1.3,2.6) D11(1.95,2.6) D12(2.6,2.6) D13(3.25,2.6) D14(3.9,2.6) D15(4.55,2.6) E2(-3.9,1.95) E3(-3.25,1.95) E5(-1.95,1.95) E6(-1.3,1.95) E7(-0.65,1.95) E8(0,1.95) E9(0.65,1.95) E10(1.3,1.95) E11(1.95,1.95) E13(3.25,1.95) E14(3.9,1.95) E15(4.55,1.95) F1(-4.55,1.3) F2(-3.9,1.3) F3(-3.25,1.3) F5(-1.95,1.3) F6(-1.3,1.3) F7(-0.65,1.3) F8(0,1.3) F9(0.65,1.3) F10(1.3,1.3) F11(1.95,1.3) F13(3.25,1.3) F14(3.9,1.3) F15(4.55,1.3) G2(-3.9,0.65) G3(-3.25,0.65) G5(-1.95,0.65) G6(-1.3,0.65) G7(-0.65,0.65) G8(0,0.65) G9(0.65,0.65) G10(1.3,0.65) G11(1.95,0.65) G13(3.25,0.65) G14(3.9,0.65) G15(4.55,0.65) H1(-4.55,0) H2(-3.9,0) H3(-3.25,0) H5(-1.95,0) H6(-1.3,0) H7(-0.65,0) H8(0,0) H9(0.65,0) H10(1.3,0) H11(1.95,0) H13(3.25,0) H14(3.9,0) H15(4.55,0) J2(-3.9,-0.65) J3(-3.25,-0.65) J5(-1.95,-0.65) J6(-1.3,-0.65) J7(-0.65,-0.65) J8(0,-0.65) J9(0.65,-0.65) J10(1.3,-0.65) J11(1.95,-0.65) J13(3.25,-0.65) J14(3.9,-0.65) J15(4.55,-0.65) K1(-4.55,-1.3) K2(-3.9,-1.3) K3(-3.25,-1.3) K5(-1.95,-1.3) K6(-1.3,-1.3) K7(-0.65,-1.3) K8(0,-1.3) K10(1.3,-1.3) K11(1.95,-1.3) K12(2.6,-1.3) K13(3.25,-1.3) K14(3.9,-1.3) K15(4.55,-1.3) L2(-3.9,-1.95) L3(-3.25,-1.95) L4(-2.6,-1.95) L5(-1.95,-1.95) L6(-1.3,-1.95) L7(-0.65,-1.95) L8(0,-1.95) L9(0.65,-1.95) L10(1.3,-1.95) L11(1.95,-1.95) L12(2.6,-1.95) L13(3.25,-1.95) L14(3.9,-1.95) L15(4.55,-1.95) M1(-4.55,-2.6) M2(-3.9,-2.6) M3(-3.25,-2.6) M4(-2.6,-2.6) M5(-1.95,-2.6) M6(-1.3,-2.6) M7(-0.65,-2.6) M9(0.65,-2.6) M10(1.3,-2.6) M11(1.95,-2.6) M12(2.6,-2.6) M14(3.9,-2.6) M15(4.55,-2.6) N1(-4.55,-3.25) N2(-3.9,-3.25) N3(-3.25,-3.25) N4(-2.6,-3.25) N5(-1.95,-3.25) N6(-1.3,-3.25) N7(-0.65,-3.25) N8(0,-3.25) N9(0.65,-3.25) N10(1.3,-3.25) N11(1.95,-3.25) N12(2.6,-3.25) N14(3.9,-3.25) N15(4.55,-3.25) P1(-4.55,-3.9) P2(-3.9,-3.9) P3(-3.25,-3.9) P4(-2.6,-3.9) P5(-1.95,-3.9) P6(-1.3,-3.9) P7(-0.65,-3.9) P8(0,-3.9) P9(0.65,-3.9) P10(1.3,-3.9) P11(1.95,-3.9) P12(2.6,-3.9) P13(3.25,-3.9) P14(3.9,-3.9) P15(4.55,-3.9) R1(-4.55,-4.55) R2(-3.9,-4.55) R3(-3.25,-4.55) R4(-2.6,-4.55) R6(-1.3,-4.55) R8(0,-4.55) R10(1.3,-4.55) R12(2.6,-4.55) R13(3.25,-4.55) R14(3.9,-4.55) R15(4.55,-4.55)
C0402
  rect 0.5x0.5 smd: 1(-0.425,0) 2(0.425,0)
C0603
  rect 0.76x0.76 smd: 1(-0.71,0) 2(0.71,0)
C0805
  rect 1.016x1.27 smd: 1(-1.016,0) 2(1.016,0)
CAP-RAD-6D3X11-2D5
  rect 1.524x1.524 hole 1.016: 1(0,0)
  round 1.524 hole 1.016: 2(2.505,0)
DFN1610-2L
  rect 0.635x1.143 smd: 1(0.572,0) 2(-0.572,0)
DFN2510P10
  rect 0.2x0.675 smd: 1(-1,-0.437) 2(-0.5,-0.437) 4(0.5,-0.437) 5(1,-0.437) 6(1,0.437) 7(0.5,0.437) 9(-0.5,0.437) 10(-1,0.437)
  rect 0.4x0.775 smd: 3(0,-0.388) 8(0,0.388)
DO-214AC
  rect 1.999x1.999 smd: 1(-1.999,0) 2(1.999,0)
ESD0402
  rect 0.5x0.5 smd: 1(-0.425,0) 2(0.425,0)
FC-135
  rect 1.016x1.778 smd: 1(-1.25,0) 2(1.25,0)
FPC6R_1X6_0R50_DUALCN
  rect 0.3x1.6 smd: 1(9.751,-2.85) 2(9.251,-2.85) 3(8.75,-2.85) 4(8.25,-2.85) 5(7.75,-2.85) 6(7.249,-2.85)
  rect 1.8x2.499 smd: 7(5.56,0.3) 8(11.44,0.3)
FPC40_PT05_H2B
  rect 0.25x1.5 smd: 1(-9.75,-0.137) 2(-9.25,-0.137) 3(-8.75,-0.137) 4(-8.25,-0.137) 5(-7.75,-0.137) 6(-7.25,-0.137) 7(-6.75,-0.137) 8(-6.25,-0.137) 9(-5.75,-0.137) 10(-5.25,-0.137) 11(-4.75,-0.137) 12(-4.25,-0.137) 13(-3.75,-0.137) 14(-3.25,-0.137) 15(-2.75,-0.137) 16(-2.25,-0.137) 17(-1.75,-0.137) 18(-1.25,-0.137) 19(-0.75,-0.137) 20(-0.25,-0.137) 21(0.25,-0.137) 22(0.75,-0.137) 23(1.25,-0.137) 24(1.75,-0.137) 25(2.25,-0.137) 26(2.75,-0.137) 27(3.25,-0.137) 28(3.75,-0.137) 29(4.25,-0.137) 30(4.75,-0.137) 31(5.25,-0.137) 32(5.75,-0.137) 33(6.25,-0.137) 34(6.75,-0.137) 35(7.25,-0.137) 36(7.75,-0.137) 37(8.25,-0.137) 38(8.75,-0.137) 39(9.25,-0.137) 40(9.75,-0.137)
  rect 1.7x3.02 smd: 41(-11.4,3.05) 42(11.4,3.05)
HSCOX-AMC-TM-A
  rect 0.813x1.626 smd: 1(0,1.756)
  rect 1.168x2.184 smd: 2(-1.326,0) 3(1.326,0)
L2520
  rect 0.8x2 smd: 1(-1,0) 2(1,0)
LED0603
  rect 1.016x1.016 smd: 1(0,0) 2(1.524,0)
MARK
  round 1 smd: 1(0,0)
MINI-DIP-KEY-H
  round 1.524 hole 1.016: 1(-1.5,0) 2(1.5,0) 3(0,-1.85)
PH-02A
  round 1.219 hole 0.711: 1(0,0) 2(2,0)
PJ-327F
  round 1.524 hole 1.524 unplated: (0,3) (0,-3)
  rect 3.048x1.524 smd: 2(3.5,3.914) 3(-3.498,3.914) 4(3.5,0.615) 5(-3.498,-1.585) 6(3.5,-3.917)
R0402
  rect 0.5x0.5 smd: 1(-0.425,0) 2(0.425,0)
R0603
  rect 0.889x0.762 smd: 1(-0.699,0) 2(0.699,0)
R0805
  rect 1.016x1.27 smd: 1(-1.016,0) 2(1.016,0)
SIP2
  rect 1.524x1.524 hole 0.94: 1(0,0)
  round 1.524 hole 0.94: 2(2.54,0)
SIP3
  rect 1.524x1.524 hole 0.94: 1(-2.54,0)
  round 1.524 hole 0.94: 2(0,0) 3(2.54,0)
SIP4_2D0
  round 1.219 hole 0.711: 1(-2,0) 2(0,0) 3(2,0) 4(4,0)
SOD_323
  rect 0.85x0.6 smd: 1(-1.17,0) 2(1.17,0)
SOP8H-50-155
  rect 0.635x1.778 smd: 1(-1.905,-2.718) 2(-0.635,-2.718) 3(0.635,-2.718) 4(1.905,-2.718) 5(1.905,2.718) 6(0.635,2.718) 7(-0.635,2.718) 8(-1.905,2.718)
  rect 3.81x2.794 smd: 9(0.009,0.014)
SOT23
  rect 1.016x1.27 smd: 1(-1.016,-1.143) 2(1.016,-1.143) 3(0,1.143)
SOT23-5
  rect 0.508x1.016 smd: 1(-0.95,-1.3) 2(0,-1.3) 3(0.95,-1.3) 4(0.95,1.3) 5(-0.95,1.3)
SOT23_6
  rect 0.635x1.397 smd: 1(-0.95,-1.2) 2(0,-1.2) 3(0.95,-1.2) 4(0.95,1.2) 5(0,1.2) 6(-0.95,1.2)
SOT_323
  rect 0.7x0.9 smd: 1(-0.65,-0.95) 2(0.65,-0.95) 3(0,0.95)
SPI-9P-NAND-OR-NOR
  rect 2.4x0.5 smd: 1(-3.84,1.905) 2(-3.84,0.635) 3(-3.84,-0.635) 4(-3.84,-1.905) 5(3.84,-1.905) 6(3.84,-0.635) 7(3.84,0.635) 8(3.84,1.905)
  rect 3.4x4.3 smd: 9(0,0)
SPL0404B
  rect 1.397x4.013 smd: 1(-1.352,0) 2(1.352,0)
SPL0707G
  rect 2.489x3.404 smd: 1(-3.094,0) 2(3.094,0)
T-FLASH-A
  round 0.889 hole 0.889 unplated: (4.3,10.5) (12.301,10.5)
  rect 0.599x1.001 smd: 1(5.1,-0.5) 2(6.2,-0.5) 3(7.3,-0.5) 4(8.4,-0.5) 5(9.5,-0.5) 6(10.599,-0.5) 7(11.699,-0.5) 8(12.799,-0.5) 9(13.899,-0.5)
  rect 1.3x1.001 smd: 10(15.4,0.5)
  rect 1.501x1.199 smd: 11(0,0.599)
  rect 1.501x1.999 smd: 12(15.001,10.15) 13(-0.8,10.099)
THO-5D0-2D2D
  round 5.08 hole 2.2: 1(0,0)
TP_0R50
  round 0.5 smd: 1(0,0)
USB-WIFI
  oval 2.4x1.2 smd: 1(-5.973,4.043) 2(-5.973,2.043) 3(-5.973,-0.937) 4(-5.973,-3.097) 11(6.227,-5.254) 12(6.227,-2.454) 13(6.227,1.046) 14(6.227,3.545)
  oval 0.7x2 smd: 5(-2.569,-6.627) 6(-1.299,-6.627) 7(-0.029,-6.627) 8(1.241,-6.627) 9(2.511,-6.627) 10(3.781,-6.627) 15(3.781,6.373) 16(2.511,6.373) 17(1.241,6.373) 18(-0.029,6.373) 19(-1.299,6.373) 20(-2.569,6.373)
USB_A_SMT_4MNT
  rect 1.143x2.032 smd: 1(0,0) 2(2.5,0) 3(4.5,0) 4(7,0)
  oval 1.219x2.235 hole 0.635x1.6: 5(-2.9,-1.85) 6(9.885,-1.85) 7(-2.9,-7.85) 8(9.885,-7.85)
WBC0119-20R-A
  round 1.1 hole 1.1 unplated: (7.66,12.905) (12.66,12.905)
  rect 0.254x2.591 smd: 1(14.66,15.315) 2(14.16,15.315) 3(13.66,15.315) 4(13.16,15.315) 5(12.66,15.315) 6(12.16,15.315) 7(11.66,15.315) 8(11.16,15.315) 9(10.66,15.315) 10(10.16,15.315) 11(9.66,15.315) 12(9.16,15.315) 13(8.66,15.315) 14(8.16,15.315) 15(7.66,15.315) 16(7.16,15.315) 17(6.66,15.315) 18(6.16,15.315) 19(5.66,15.315)
  oval 1.524x3.302 hole 0.914x2.667: 20(2.91,14.555) 21(17.41,14.555)
  oval 1.524x2.794 hole 0.914x2.083: 22(2.91,8.595) 23(17.41,8.595)
X3225
  rect 1.397x1.27 smd: 1(-1.1,-0.85) 2(1.1,-0.85) 3(1.1,0.85) 4(-1.1,0.85)
XH-05A
  oval 1.524x2.54 hole 0.889: 1(-2.54,0) 2(0,0) 3(2.54,0) 4(5.08,0) 5(7.62,0)

## Nets
3V3_E2: CC8.2(B) DC2.2(K) JC4.1(P1) RC16.2 RC17.1 UC1.4(VCC)
5VD: CP7.2 CP8.1 CP9.1 CP10.1 CP16.1 CP21.1 CP26.1 CP32.1 CP33.1 CP34.1 CV05.1 DP1.2(K) DV01.1(K) LP1.2 LV01.1 RP7.2 RP27.1 RP32.2 RP35.2 RU16.1 UP3.4(IN) UP4.4(IN) UP5.4(IN) UP6.4(IN) UU01.5(IN) UV01.6(VIN)
12VD: CP1.1 CP2.1 CP5.1 CP6.2 JP1.2 JP1.4 RP5.1 RP6.1 UP2.8(PVIN)
AGND: CC17.2 CC18.2 CC19.2 CC20.2 RC28.2 U1.A13(AGND)
AVCC: CC17.1 CC18.1 U1.D12(AVCC)
GND: ANT1.2(GND1) ANT1.3(GND2) ANT2.2(GND1) ANT2.3(GND2) C1.1 C3.1 C4.1 C5.1 C122.1 C123.1 CC1.1 CC2.1 CC3.1 CC5.1 CC6.1 CC7.2 CC8.1(A) CC9.2 CC10.2 CC11.2 CC12.2 CC13.2 CC14.2 CC15.2 CC16.2 CC21.1 CC22.1 CC23.1 CC24.1 CC25.1 CC26.1 CC27.2 CC28.2 CC29.2 CC30.2 CC31.1 CC32.1 CC33.1 CC34.1 CC35.1 CC36.1 CD1.1 CD2.1 CD3.1 CD4.1 CD5.1 CD6.1 CD8.1 CD9.1 CD10.1 CD11.1 CD12.1 CD13.1 CD14.1 CD15.1 CD16.1 CD17.1 CM1.1 CP1.2 CP2.2 CP5.2 CP6.1 CP8.2 CP9.2 CP10.2 CP11.1 CP12.1 CP13.1 CP14.2 CP15.2 CP16.2 CP17.2 CP19.2 CP21.2 CP22.2 CP23.2 CP24.2 CP26.2 CP27.2 CP28.2 CP30.2 CP31.2 CP32.2 CP33.2 CP34.2 CU01.2(B) CV01.2 CV02.2 CV04.1 CV05.2 CV06.2 CV07.2 CV10.2 CV11.2 CV12.2 D83.2 D84.2 D85.2 D86.2 D87.2 D88.2 D89.2 DA01.2 DA02.2 DA03.2 DC1.2(CATHODE) DM2.2(CATHODE) DU01.2 DU02.2 DU07.1(ANODE) DV03.2 DV04.2 DV05.2 DV06.2 DV07.3 DV07.8 DV08.3 DV08.8 DV09.2 DV10.2 DV11.2 DV12.2 DW1.2(CATHODE) DW2.2(CATHODE) J50.6(GND) J50.10 J50.11 J50.12 J50.13 JA01.5 JA01.13 JA01.14 JA01.15 JC1.3 JC4.4(P4) JC5.1 JP1.1 JP1.5 JU01.4(GND) JU01.5(SHIELD-1) JU01.6(SHIELD-2) JU01.7(SHIELD-3) JU01.8(SHIELD-4) JV01.2 JV01.5 JV01.8 JV01.11 JV01.17 JV01.20(S1) JV01.21(S2) JV01.22(S3) JV01.23(S4) JV02.1(GND12) JV02.2(GND11) JV02.5(GND10) JV02.9(GND9) JV02.16(GND8) JV02.19(GND7) JV02.22(GND6) JV02.25(GND5) JV02.28(GND4) JV02.31(GND3) JV02.34(GND2) JV02.37(GND1) JV02.41(GND13) JV02.42(GND14) JV04.1(GND) JV04.7(NC1) JV04.8(NC2) JV05.4(GND) JV05.7(NC1) JV05.8(NC2) K1.1 K1.3 RA11.2 RC28.1 RD1.1 RD3.1 RD5.1 RP10.2 RP11.1 RP17.2 RP21.2 RP30.2 RP31.2 RP34.1 RP37.1 RU04.1 RU05.2 RV17.1 RV19.2 RV20.2 TH1.1 TH2.1 TP2.1(TP) U1.A1(GND0) U1.A15(GND1) U1.C8(GND2) U1.D11(GND3) U1.E3(GND4) U1.E8(GND5) U1.E13(GND6) U1.F6(GND7) U1.F7(GND8) U1.F8(GND9) U1.F9(GND10) U1.F10(GND11) U1.G6(GND12) U1.G7(GND13) U1.G8(GND14) U1.G9(GND15) U1.G10(GND16) U1.H2(GND17) U1.H6(GND18) U1.H7(GND19) U1.H8(GND20) U1.H9(GND21) U1.H10(GND22) U1.H13(GND23) U1.J6(GND24) U1.J9(GND25) U1.J10(GND26) U1.K3(GND27) U1.K12(GND28) U1.L2(GND29) U1.L5(GND30) U1.L8(GND31) U1.L13(GND32) U1.N6(GND33) U1.N9(GND34) U1.N12(GND35) U1.P3(GND36) U1.R1(GND37) U1.R15(GND38) UC1.2(GND) UC1.5(WP) UC2.1(GND) UD1.A9(VSS#9) UD1.B1(VSSQ#1) UD1.B3(VSS#6) UD1.B9(VSSQ#7) UD1.D1(VSSQ#2) UD1.D8(VSSQ#5) UD1.E1(VSS#1) UD1.E2(VSSQ#4) UD1.E8(VSSQ#6) UD1.F9(VSSQ#8) UD1.G1(VSSQ#3) UD1.G8(VSS#7) UD1.G9(VSSQ#9) UD1.J2(VSS#5) UD1.J8(VSS#8) UD1.M1(VSS#2) UD1.M9(VSS#10) UD1.P1(VSS#3) UD1.P9(VSS#11) UD1.T1(VSS#4) UD1.T9(VSS#12) UM1.4(VSS) UM1.9(EPAD) UP2.9(GND2) UP3.2(GND) UP4.2(GND) UP5.2(GND) UP6.2(GND) UU01.2(GND) UV01.2(GND) UW1.1(GND0) UW1.4(GND1) UW1.14(GND2) YC1.2(GND1) YC1.4(GND2)
GNDA: JA01.1 JA02.2 JA02.5 RA11.1
VCC33-WIFI: C1.2 C3.2 R10.2 RP26.2 UW1.11(VIN)
VCC-3V3: CC2.2 CC3.2 CC5.2 CC7.1 CC9.1 CP25.2 CP27.1 CP28.1 CV04.2 CV10.1 CV12.1 DC2.1(A) DP2.1 DV02.1(K) JV02.4(TP_VDD) JV02.38(IOVCC2-3V3) JV02.39(IOVCC1-3V3) JV04.6(VCC) JV05.5(VCC) LP4.2 QC1.1(G) QC4.1(GATE) QC5.1(GATE) RC3.1 RC9.1 RC18.1 RC19.2 RC20.2 RC27.1 RC38.1(A) RC39.1(A) RC41.1 RP12.1 RP14.2 RP26.1 RP28.2 RP33.1 RV16.2 RV37.1 RV38.1 U1.D5(VCC_PG) U1.E5(VCC_PF) U1.F11(VCC_IO) U1.J11(VCC_PD) UC2.3(VIN)
VCC-DRAM: CD1.2 CD2.2 CD3.2 CD4.2 CD5.2 CD7.2 CD10.2 CD11.2 CD12.2 CD13.2 CD14.2 CD15.2 CD16.2 CD17.2 CP29.2 CP30.1 CP31.1 LP5.2 RD2.2 RP9.2 RP36.1 U1.J7(VCC_DRAM0) U1.J8(VCC_DRAM1) U1.K7(VCC_DRAM2) U1.K8(VCC_DRAM3) UD1.A1(VDDQ#1) UD1.A8(VDDQ#6) UD1.B2(VDD#3) UD1.C1(VDDQ#2) UD1.C9(VDDQ#9) UD1.D2(VDDQ#4) UD1.D9(VDD#7) UD1.E9(VDDQ#8) UD1.F1(VDDQ#3) UD1.G7(VDD#5) UD1.H2(VDDQ#5) UD1.H9(VDDQ#7) UD1.K2(VDD#4) UD1.K8(VDD#6) UD1.N1(VDD#1) UD1.N9(VDD#8) UD1.R1(VDD#2) UD1.R9(VDD#9)
VCC-LVDS: CC6.2 CC14.1 CC26.2 CC27.1 RP13.1 RP18.1 U1.G5(VCC_PLL) U1.G11(VCC_LVDS) U1.H5(VCC_RTC) U1.H11(VCC_HDMI)
VCC-PC: CC1.2 CM1.2 RM3.1 RM4.1 RM5.1 RP12.2 RP18.2 U1.F5(VCC_PC) UM1.8(VCC)
VDD-CPU: CC21.2 CC22.2 CC23.2 CC24.2 CC25.2 CP14.1 CP15.1 LP2.2 RP16.1 U1.D6(VDD_CPU0) U1.D7(VDD_CPU1) U1.E6(VDD_CPU2) U1.E7(VDD_CPU3)
VDD-CPUFB: RP20.1 U1.D8(VDD_CPUFB)
VDD-SYS: CC31.2 CC32.2 CC33.2 CC34.2 CC35.2 CP20.2 CP22.1 CP23.1 LP3.2 RP29.1 U1.D9(VDD_SYS0) U1.D10(VDD_SYS1) U1.E9(VDD_SYS2) U1.E10(VDD_SYS3)
AP-RESET: CC15.1 RC24.1 RC27.2 UC2.2(RESET-N)
AUX_DET: JA01.4 RA08.1
AUXL: JA01.2 RA10.1
AUXR: JA01.3 RA09.1
BT-HOST-WUP: R10.1 UW1.10(AP_WAK_BT)
BT_WAK_AP: UW1.9(BT_WAK_AP)
CPU-P-PWM: RP24.1 U1.D15(PB0/PWM3/IR_TX/TWI2_SCK/SPI1_WP)
CTPINT: DV09.1 JV02.6(TP_INT) JV04.2(INT) JV05.3(INT) RV36.2
CTPRST: DV12.1 JV02.3(TP_RST) JV04.5(RST) JV05.6(RST) RV33.2
CTPSCL: DV10.1 JV02.8(TP_SCL) JV04.3(SCL) JV05.1(SCL) RV35.2
CTPSDA: DV11.1 JV02.7(TP_SDA) JV04.4(SDA) JV05.2(SDA) RV34.2
DCXO-XIN: CC10.1 U1.J2(DXIN) YC1.1(XIN)
DCXO-XOUT: RC25.1 U1.J3(DXOUT)
DEBUG_SW: RC21.2 U1.B2(PG16/IR_RX/TCON_TRIG/PWM5/CLK_F)
DISABLE_FELKEY: RM6.1 U1.B15(PB11/DMIC_DATA0/PWM2/TWI0_SDA/S)
E2-SCK: JC4.2(P2) QC4.3(DRAIN) RC16.1 UC1.1(SCL)
E2-SDA: JC4.3(P3) QC5.3(DRAIN) RC17.2 UC1.3(SDA)
FUCTIONKEY: RM1.2 U1.B14(PB12/DMIC_CLK/PWM0/SPI1_CS/DBI_)
GPADC0: TP5.1(TP) U1.C11(GPADC0)
HCEC: RV07.1 U1.J13(HCEC)
HDMI-5V: CV01.1 DV01.2(A) JV01.18 RV01.2 RV04.2
HDMI-CEC: DV04.1 JV01.13 RV05.1 RV07.2
HDMI-SCL: DV05.1 JV01.15 RV04.1 RV06.1
HDMI-SDA: DV06.1 JV01.16 RV01.1 RV02.2
HHPD: CV02.1 DV03.1 RV03.1 U1.K13(HHPD)
HHPD_IN: JV01.19 RV03.2
HPOUTFB: U1.B12(HPOUTFB)
HPOUTL: TP3.1(TP) U1.C12(HPOUTL)
HPOUTR: TP4.1(TP) U1.A12(HPOUTR)
HPVCC: CC16.1 U1.E11(HPVCC)
HSCL: RV06.2 U1.F13(HSCL)
HSDA: RV02.1 U1.G13(HSDA)
HTX0N: RV13.1 U1.G15(HTX0N)
HTX0P: RV12.1 U1.G14(HTX0P)
HTX1N: RV10.1 U1.F15(HTX1N)
HTX1P: RV11.1 U1.F14(HTX1P)
HTX2N: RV09.1 U1.E15(HTX2N)
HTX2P: RV08.1 U1.E14(HTX2P)
HTXCN: RV15.1 U1.H15(HTXCN)
HTXCP: RV14.1 U1.H14(HTXCP)
I2C1_SCL: QC4.2(SOURCE) RC19.1 U1.B3(PG8/UART1_RTS/TWI1_SCK/RGMII_RX)
I2C1_SDA: QC5.2(SOURCE) RC20.1 U1.A2(PG9/UART1_CTS/TWI1_SDA/RGMII_RX)
I2C2_SCL: RV35.1 RV38.2 U1.B4(PG6/UART1_TX/TWI2_SCK/RGMII_TXD)
I2C2_SDA: RV34.1 RV37.2 U1.A3(PG7/UART1_RX/TWI2_SDA/RGMII_TXD)
I2S1-BCLK: RA04.2 U1.B5(PG13/I2S1_BCLK/TWI0_SDA/RGMII_C)
I2S1-DIN0: RA05.2 U1.C5(PG14/I2S1_DIN0/TWI2_SCK/MDC/I2S)
I2S1-DOUT0: RA06.2 U1.A4(PG15/I2S1_DOUT0/TWI2_SDA/MDIO/I)
I2S1-LRCK: RA03.2 U1.C6(PG12/I2S1_LRCK/TWI0_SCK/RGMII_T)
I2S1_MCLK: RA07.2 U1.B6(PG11/I2S1_MCLK/TWI3_SDA/EPHY_25)
IR-RX: U1.D14(PB1/PWM4/I2S2_DOUT3/TWI2_SDA/I2)
LCD-BL-EN: RV39.2 U1.B8(PG0/SDC1_CLK/UART3_TX/RGMII_RXC)
LCD-PWM: RV18.1 U1.C9(PG1/SDC1_CMD/UART3_RX/RGMII_RXD)
LDO-IN: CC28.1 DP2.2 U1.K5(LDO_IN)
LDOA-OUT: CC30.1 RP13.2 U1.J5(LDOA_OUT)
LDOB-OUT: CC29.1 RP9.1 U1.K6(LDOB_OUT)
MUTE: U1.C10(PG17/UART2_TX/TWI3_SCK/PWM7/CLK)
NC9: UW1.17(NC9)
PC2: RC2.1 U1.F3(PC2/SPI0_CLK/SDC2_CLK/PC_EINT2)
PCM_CLK: UW1.8(PCM_CLK)
PCM_IN: UW1.5(PCM_IN)
PCM_OUT: UW1.6(PCM_OUT)
PCM_SYNC: UW1.7(PCM_SYNC)
RXD0: UW1.15(RXD0)
RXD0_232: JC1.1 QC1.3(D) RC4.2
SA0: U1.M12(SA15) UD1.N3(A0)
SA1: U1.N11(SA0) UD1.P7(A1)
SA2: U1.P12(SA8) UD1.P3(A2)
SA3: U1.L9(SRAS) UD1.N2(A3)
SA4: U1.R13(SA5) UD1.P8(A4)
SA5: U1.L10(SA3) UD1.P2(A5)
SA6: U1.R14(SA12) UD1.R8(A6)
SA7: U1.M10(SA2) UD1.R2(A7)
SA8: U1.P15(SA14) UD1.T8(A8)
SA9: U1.P13(SA7) UD1.R3(A9)
SA10: U1.P10(SA11) UD1.L7(A10)
SA11: U1.R12(SCAS) UD1.R7(A11)
SA12: U1.N10(SA10) UD1.N7(A12)
SA13: U1.L11(SA4) UD1.T3(A13)
SA14: U1.L12(SA13) UD1.T7(A14)
SA15: U1.R10(SWE) UD1.M7(A15)
SBA0: U1.N8(SBA2) UD1.M2(BA0)
SBA1: U1.P11(SA9) UD1.N8(BA1)
SBA2: U1.M11(SA1) UD1.M3(BA2)
SCAS: U1.P9(SBA1) UD1.K3(CAS#)
SCKE0: U1.R8(SCKE0) UD1.K9(CKE0)
SCKN: RD4.2 U1.N7(SCKN) UD1.K7(CK#)
SCKP: RD4.1 U1.P7(SCKP) UD1.J7(CK)
SCS0: U1.P8(SCS0) UD1.L2(CS0#)
SDC0-CLK: D86.1 J50.5(CLK) RC31.2
SDC0-CMD: D87.1 J50.3(CMD) RC38.2(B) U1.D3(PF3/SDC0_CMD/JTAG_DO/R_JTAG_DO/)
SDC0-D0: D85.1 J50.7(D0) U1.C3(PF1/SDC0_D0/JTAG_DI/R_JTAG_DI/I)
SDC0-D1: D84.1 J50.8(D1) U1.B1(PF0/SDC0_D1/JTAG_MS/R_JTAG_MS/I)
SDC0-D2: D89.1 J50.1(D2) U1.D1(PF5/SDC0_D2/JTAG_CK/R_JTAG_CK/I)
SDC0-D3: D88.1 J50.2(D3) U1.D2(PF4/SDC0_D3/UART0_RX/TWI0_SDA/P)
SDC0-DET: RC40.1 U1.E2(PF6/SPDIF_OUT/IR_RX/I2S2_MCLK/P)
SDQ0: U1.L4(SDQ0) UD1.F2(DQL2)
SDQ1: U1.M4(SDQ1) UD1.E3(DQL0)
SDQ2: U1.M5(SDQ2) UD1.G2(DQL6)
SDQ3: U1.M6(SDQ3) UD1.H3(DQL4)
SDQ4: U1.N4(SDQ4) UD1.F8(DQL3)
SDQ5: U1.N5(SDQ5) UD1.H8(DQL5)
SDQ6: U1.P5(SDQ6) UD1.H7(DQL7)
SDQ7: U1.P4(SDQ7) UD1.F7(DQL1)
SDQ8: U1.R3(SDQ8) UD1.D7(DQU0)
SDQ9: U1.M1(SDQ9) UD1.A2(DQU5)
SDQ10: U1.P2(SDQ10) UD1.A7(DQU4)
SDQ11: U1.M2(SDQ11) UD1.A3(DQU7)
SDQ12: U1.N3(SDQ12) UD1.C8(DQU2)
SDQ13: U1.N2(SDQ13) UD1.C2(DQU3)
SDQ14: U1.R2(SDQ14) UD1.B8(DQU6)
SDQ15: U1.M3(SDQ15) UD1.C3(DQU1)
SDQM0: U1.L6(SDQM0) UD1.E7(DML)
SDQM1: U1.R4(SDQM1) UD1.D3(DMU)
SDQS0N: U1.P6(SDQS0N) UD1.G3(DQSL#)
SDQS0P: U1.R6(SDQS0P) UD1.F3(DQSL)
SDQS1N: U1.P1(SDQS1N) UD1.B7(DQSU#)
SDQS1P: U1.N1(SDQS1P) UD1.C7(DQSU)
SODT0: U1.M7(SODT0) UD1.K1(ODT0)
SPDIF_OUT: U1.B9(PG18/UART2_RX/TWI3_SDA/PWM6/CLK)
SPI0-CLK: RC2.2 UM1.6(CLK)
SPI0-CS0: RM2.1 RM5.2 TP1.1(TP) U1.F2(PC3/SPI0_CS0/SDC2_CMD/PC_EINT3) UM1.1(CS#)
SPI0-HOLD: RM4.2 U1.H3(PC7/SPI0_HOLD/SDC2_D3/UART3_RX/) UM1.7(HOLD#)
SPI0-MISO: U1.G3(PC5/SPI0_MISO/SDC2_D1/BOOT_SEL1) UM1.2(MISO)
SPI0-MOSI: U1.F1(PC4/SPI0_MOSI/SDC2_D2/BOOT_SEL0) UM1.5(MOSI)
SPI0-WP: RM3.2 U1.G2(PC6/SPI0_WP/SDC2_D0/UART3_TX/TW) UM1.3(WP#)
SRAS: U1.M9(SA6) UD1.J3(RAS#)
SRST: U1.P14(SRST) UD1.T2(RESET)
SVREF: CD6.2 CD7.1 CD8.2 CD9.2 RD2.1 RD3.2 U1.K11(SVREF) UD1.H1(VREFDQ) UD1.M8(VREFCA)
SWE: U1.L7(SBA0) UD1.L3(WE)
TA1+: JV02.32(MIPI-0P) U1.N15(PD0/LCD0_D2/LVDS0_V0P/DSI_D0P/T)
TA1-: JV02.33(MIPI-0N) U1.N14(PD1/LCD0_D3/LVDS0_V0N/DSI_D0N/U)
TB1+: JV02.29(MIPI-1P) U1.M15(PD2/LCD0_D4/LVDS0_V1P/DSI_D1P/U)
TB1-: JV02.30(MIPI-1N) U1.M14(PD3/LCD0_D5/LVDS0_V1N/DSI_D1N/U)
TC1+: JV02.26(MIPI-CKP) U1.L15(PD4/LCD0_D6/LVDS0_V2P/DSI_CKP/U)
TC1-: JV02.27(MIPI-CKN) U1.L14(PD5/LCD0_D7/LVDS0_V2N/DSI_CKN/U)
TCL1+: JV02.23(MIPI-2P) U1.K15(PD6/LCD0_D10/LVDS0_CKP/DSI_D2P/)
TCL1-: JV02.24(MIPI-2N) U1.K14(PD7/LCD0_D11/LVDS0_CKN/DSI_D2N/)
TD1+: JV02.20(MIPI-3P) U1.J15(PD8/LCD0_D12/LVDS0_V3P/DSI_D3P/)
TD1-: JV02.21(MIPI-3N) U1.J14(PD9/LCD0_D13/LVDS0_V3N/DSI_D3N/)
TP_INT: RV36.1 U1.C7(PG5/SDC1_D3/UART5_RX/RGMII_TXD1)
TP_RST: RV33.1 U1.A6(PG4/SDC1_D2/UART5_TX/RGMII_TXD0)
TX_CKN: DV08.5 DV08.6 JV01.12 RV15.2
TX_CKP: DV08.4 DV08.7 JV01.10 RV14.2
TX_D0N: DV08.2 DV08.9 JV01.9 RV13.2
TX_D0P: DV08.1 DV08.10 JV01.7 RV12.2
TX_D1N: DV07.5 DV07.6 JV01.6 RV10.2
TX_D1P: DV07.4 DV07.7 JV01.4 RV11.2
TX_D2N: DV07.2 DV07.9 JV01.3 RV09.2
TX_D2P: DV07.1 DV07.10 JV01.1 RV08.2
TXD0_232: JC1.2 RC1.2
UART0-RX: QC1.2(S) RC3.2 RC4.1 U1.C14(PB9/DMIC_DATA2/PWM6/TWI2_SDA/SP)
UART0-TX: RC1.1 U1.D13(PB8/DMIC_DATA3/PWM5/TWI2_SCK/SP)
UART4_RX: RA02.2 U1.B7(PG3/SDC1_D1/UART3_CTS/RGMII_TXC)
UART4_TX: RA01.2 U1.A8(PG2/SDC1_D0/UART3_RTS/RGMII_RXD)
USB0-DM: RU01.1 U1.A10(USB0_DM)
USB0-DP: RU03.2 U1.B10(USB0_DP)
USB1-DM: R2.2 U1.A11(USB1_DM)
USB1-DP: R1.2 U1.B11(USB1_DP)
USB-DRVVBUS: RU07.1 U1.C13(PB10/DMIC_DATA1/PWM7/TWI0_SCK/S)
USB_DM0_C: DU02.1 JU01.2(DM) RU01.2
USB_DP0_C: DU01.1 JU01.3(DP) RU03.1
USBVBUS: CU01.1(A) DP1.1(A) DU07.2(CATHODE) JU01.1(VBUS) RU16.2 UU01.1(OUT)
VLED+: CV06.1 CV07.1 D134.2(K) JV02.10(VLED+2) JV02.11(VLED+1) JV03.1 UV01.5(OVP)
VLED-: JV02.12(VLED-2) JV02.13(VLED-1) JV03.2 RV19.1 RV20.1 UV01.3(FB)
VRA1: CC19.1 U1.B13(VRA1)
VRA2: CC20.1 U1.A14(VRA2)
WL-REG-ON: R9.2 U1.C4(PG10/PWM3/TWI3_SCK/RGMII_RXCK/C)
X32KIN: CC12.1 RC26.1 U1.K1(X32KIN) YC2.1
X32KOUT: CC13.1 RC26.2 U1.K2(X32KOUT) YC2.2
N15859: R2.1 UW1.12(USB_DM)
N16067: C5.2 R7.2 UW1.2(RF0)
N16149: ANT1.1(ANT) C4.2 DW1.1(ANODE) R7.1
N16197: R1.1 UW1.13(USB_DP)
N23009: UW1.20(WL_WAKE_HOST)
N23079: R9.1 UW1.18(CHIP_EN)
N22393328: CC11.1 RC25.2 YC1.3(XOUT)
N23282647: RC24.2 U1.L3(RESET)
N23334352: RD5.2 UD1.L8(ZQ0)
N23334547: RD1.2 U1.K10(SZQ)
N23428299: CP20.1 RP29.2 RP31.1 UP4.5(FB)
N23428303: LP3.1 UP4.3(LX)
N23428319: CP18.1 RP19.2 RP21.1 RP22.2 UP3.5(FB)
N23428349: CP18.2 RP16.2 RP19.1 RP20.2
N23428353: LP2.1 UP3.3(LX)
N23428607: RP22.1 RP23.2
N23428609: CP19.1 RP23.1 RP24.2
N23428705: CP24.1 RP27.2 RP28.1 RP30.1 UP4.1(EN)
N23428761: LP4.1 UP5.3(LX)
N23428763: CP25.1 RP33.2 RP34.2 UP5.5(FB)
N23428817: RP32.1 UP5.1(EN)
N23428980: CP17.1 RP14.1 RP17.1 UP3.1(EN)
N23537662: DM1.2 DM2.1(ANODE) K1.2 RM1.1 RM7.2
N23537712: QM1.2(S) RM2.2
N23537714: QM1.1(G) RM6.2 RM7.1
N23537771: DM1.1 QM1.3(D)
N23561836: LP5.1 UP6.3(LX)
N23561838: CP29.1 RP36.2 RP37.2 UP6.5(FB)
N23561889: RP35.1 UP6.1(EN)
N23633436: CP4.1 LP1.1 UP2.2(SW)
N23633442: RP7.1 RP8.2 RP11.2 UP2.5(FB)
N23633517: CP4.2 UP2.1(BOOST)
N23633558: CP7.1 RP8.1
N23648435: DV02.2(A) RV05.2
N23673105: JC5.2 RC18.2 RC21.1
N23731748: RC29.2 U1.H1(REFCLK_OUT)
N23792438: RV17.2 RV18.2 UV01.4(EN/PWM)
N23792607: D134.1(A) LV01.2 UV01.1(LX)
N23793721: CV11.1 JV02.36(RST) RV16.1 RV39.1
N23801539: C123.2 R11.2 UW1.3(RF1)
N23801543: ANT2.1(ANT) C122.2 DW2.1(ANODE) R11.1
N23805182: RC31.1 U1.C2(PF2/SDC0_CLK/UART0_TX/TWI0_SCK/)
N23805731: CC36.2 J50.4(VDD) RC41.2
N23805794: D83.1 J50.9(DET) RC39.2(B) RC40.2
N23821165: RU04.2 RU07.2 UU01.4(EN)
N23821244: RU05.1 UU01.3(ISET)
N23828121: DA03.1 JA02.4 RA09.2
N23828123: DA02.1 JA02.6 RA10.2
N23828303: DA01.1 JA02.3 RA08.2
N23828831: JA01.12 RA07.1
N23829061: JA01.6 RA01.1
N23829063: JA01.7 RA02.1
N23829237: JA01.8 RA03.1
N23829248: JA01.9 RA04.1
N23829250: JA01.10 RA05.1
N23829270: JA01.11 RA06.1
N23845738: RP5.2 RP10.1 RP38.2 UP2.3(EN)
N23845803: CP13.2 UP2.4(SS)
N23845810: CP11.2 RP6.2 UP2.7(SVIN)
N23845822: CP12.2 UP2.6(VCC)
N23846703: JP1.3 RP38.1
N235160450: DC1.1(ANODE) RC9.2

Pads without a net: JV01 14; JV02 14 15 17 18 35 40; M1 1; M2 1; M3 1; M4 1; M5 1; M6 1; RC29 1; UD1 J1 J9 L1 L9; UW1 16 19

## Via types
v1: diameter 0.406, hole 0.203, TOP to BOTTOM, 1127 vias

## Routing (per net, layer and track width the routed paths; a pad name or vN(x,y) marks a point on that pad's centre or on a via; arc(x,y) is an arc through that point)
3V3_E2: length 15.4
  TOP w0.254: 71.63,57.5 72.6,57.5 72.96,57.14 DC2.2 73.82,57.14 75.13,58.45 75.13,59.81 75.39,60.07 JC4.1 ; 71.63,57.5 CC8.2 ; 71.63,57.5 71.38,57.76 RC17.1 70.44,57.79 68.5,57.79 68.24,57.53 UC1.4 66.71,58.33 RC16.2
5VD: length 33.5
  TOP w0.152: RP27.1 21.8,57.74 ; CP7.2 RP7.2
  TOP w0.254: 33.01,33.27 33.01,31.73 RP32.2 ; 33.01,33.27 v1(32.93,33.18) ; 33.01,33.27 v1(33.01,33.85) ; CP7.2 13.66,43.23 v1(13.31,42.87)
  TOP w0.47: CP10.1 20.88,58.78 ; CP10.1 19,58.78 ; CP10.1 19.94,59.72 ; CP10.1 19.94,57.84
  VDD w0.254: v1(13.31,42.87) 26.03,42.87 v1(26.17,42.73)
  BOTTOM w0.47: 19.94,58.21 19.94,57.84 ; 20.17,58.78 20.88,58.78
  BOTTOM w1.524: CP10.1 20.43,58.29 v1(20.43,57.47) 20.31,57.36 v1(20.31,56.86) ; CP10.1 20.17,58.78 23.59,62.2 ; CP10.1 19.94,58.21 v1(19.28,57.55)
  vias: v1(19.36,56.81) v1(26.17,42.17) v1(26.17,41.63) v1(26.76,42.74) v1(26.75,42.15) v1(26.77,41.59) v1(27.36,42.7) v1(27.36,42.14) v1(27.37,41.58) v1(32.33,33.21) v1(32.31,32.66) v1(32.86,32.63)
12VD: length 14.1
  TOP w0.127: 9.21,37.21 9.21,41 12.94,44.72 12.94,47.42 13.33,47.81 RP5.1
  TOP w0.254: 19.49,38.57 19.08,38.98 RP6.1 ; 8.88,36.88 9.21,37.21
AGND: length 8.9
  TOP w0.254: U1.A13 58.12,45.05 58.59,45.52 v1(58.59,45.67)
  TOP w0.381: v1(58.59,45.67) 58.7,45.67 59.33,46.3 59.33,47.61
  TOP w0.508: 59.33,47.61 59.11,47.83 CC19.2 59.25,48.13 RC28.2 59.34,49.02 CC20.2
  BOTTOM w0.254: v1(58.59,45.67) 58.59,44.37 CC18.2 CC17.2
AVCC: length 2.2
  TOP w0.254: U1.D12 57.47,42.61 v1(57.8,42.94)
  BOTTOM w0.254: CC17.1 CC18.1 58.23,43.37 v1(57.8,42.94)
GND: length 640.7
  TOP w0.102: v1(45.87,44.96) 43.34,44.96 v1(43.14,45.16) ; DU02.2 46.81,70.99 v1(46.88,70.92) ; v1(65.66,40.85) 65.48,40.85 64.69,41.64 64.69,41.73 64.38,41.42 63.82,41.42 62.88,40.48 v1(62.88,40.12) ; CC11.2 46.31,40.37 46.4,40.46 47.57,40.46 v1(47.93,40.11) ; v1(47.94,29.87) 47.96,29.87 ; 47.96,29.87 47.98,29.87 48.01,29.84 48.01,27.83 v1(47.93,27.75) 47.94,27.75 48.04,27.65 v1(48.04,25.53) 48.04,23.59 v1(48.06,23.57) 48.06,20.62 v1(48.03,20.59) ; 47.96,29.87 48.01,29.93 48.01,31.39 v1(47.95,31.45) ; U1.F10 56.48,41.61 56.48,42.31 56.78,42.61 U1.D11 ; v1(53.9,40.99) 53.57,40.66 U1.G6 ; DU01.2 v1(42.95,70.99) ; v1(46.76,41.35) 46.76,41.15 47.04,40.87 48.26,40.87 v1(48.54,40.59) ; UM1.9 v1(38.04,46.54) ; U1.H2 50.82,40.01 50.49,40.34 49.33,40.34 v1(49.07,40.59) ; 46.2,37.11 47.9,38.81 v1(47.98,38.81) 47.98,39.02 48.21,39.25 50.62,39.25 50.83,39.04 51.3,39.04 U1.K3 ; U1.N6 53.88,36.45 53.88,35.86 54.08,35.67 54.08,34.43 53.83,34.18 v1(53.83,34.05) ; 47.01,31.94 47.09,32.01 47.09,33.66 47.32,33.89 47.32,36.78 v1(47.49,36.96) 47.8,36.96 48.92,38.08 v1(48.92,38.28)
  TOP w0.127: 67.61,66.2 67.61,65.56 v1(67.47,65.42) ; U1.C8 54.87,43.28 54.56,43.6 54.56,45.04 ; v1(56.26,52.37) 56.26,51.79 56.5,51.55 v1(56.5,42.94) ; v1(47.27,44.4) 47.27,44.71 46.28,45.7 46.23,45.7 v1(46.16,45.77) ; v1(55.32,49.54) 55.04,49.82 55.04,52.25 v1(55.17,52.39) ; v1(47.32,43.54) 47.14,43.54 45.87,44.81 v1(45.87,44.96)
  TOP w0.152: UP4.2 v1(29.73,60.31) ; v1(46.16,45.77) 44.22,45.77 43.62,46.38 41.97,46.38 41.69,46.65 41.69,49.16 40.52,50.34 38.44,50.34 38.04,49.94 v1(38.04,46.54) ; UM1.9 39.29,45.72 39.29,49.61 39.52,49.84 40.3,49.84 41.06,49.08 41.06,46.16 42.09,45.14 43.11,45.14 v1(43.14,45.16)
  TOP w0.203: v1(74.44,10.89) 74.13,10.58 JV02.2 ; v1(67.11,10.65) 67.13,10.63 JV02.16 67.13,8.17 v1(67.01,8.05) ; v1(70.63,7.84) 70.63,7.84 JV02.9 ; v1(61.16,8.05) 61.13,8.08 JV02.28 61.13,10.64 v1(61.11,10.66) ; v1(62.65,10.66) 62.63,10.64 JV02.25 62.63,8.05 v1(62.64,8.05) ; v1(72.29,8.03) 72.63,8.37 JV02.5 72.63,10.33 72.78,10.48 72.91,10.48 73.47,11.05 v1(73.47,11.14) ; v1(65.57,8.05) 65.63,8.11 JV02.19 v1(65.63,10.66) ; v1(56.6,8.05) 56.63,8.08 JV02.37 56.63,10.5 v1(56.74,10.6) ; v1(64.11,10.66) 64.13,10.64 JV02.22 64.13,8.06 v1(64.12,8.05) ; v1(59.63,8.05) JV02.31 59.63,10.63 v1(59.65,10.65) ; JV02.41 76.28,4.49 v1(76.39,4.38) ; JV02.1 74.63,10.29 v1(75.23,10.89) ; v1(58.12,8.05) 58.13,8.06 JV02.34 58.13,10.63 v1(58.16,10.66)
  TOP w0.254: U1.H8 v1(55.2,39.69) ; U1.H8 v1(54.55,40.34) ; U1.H8 v1(55.2,40.34) ; v1(55.2,39.69) U1.J9 U1.J10 ; v1(55.2,39.69) U1.H9 ; U1.N12 57.63,36.61 58.28,36.61 v1(58.45,36.43) ; CP31.2 37.25,27.27 v1(36.78,27.75) ; U1.G7 v1(53.9,40.99) ; U1.G7 v1(54.55,40.99) ; U1.G7 v1(53.9,40.34) ; U1.G7 v1(54.55,40.34) ; v1(53.9,40.99) U1.G6 53.58,40.66 v1(53.9,40.34) ; v1(53.9,40.99) U1.F7 v1(54.55,40.99) ; v1(53.9,40.99) U1.F6 ; v1(27.33,70.38) 27.62,70.08 DV04.2 27.79,69.85 v1(28.14,69.5) ; v1(54.55,40.99) 54.87,41.31 U1.F8 ; v1(54.55,40.99) U1.G8 ; v1(55.2,40.99) 54.88,41.31 U1.F8 ; v1(55.2,40.99) U1.G8 ; v1(55.2,40.99) U1.F9 ; v1(55.2,40.99) U1.G9 ; JV05.4 38.28,7.77 38.48,7.57 ; U1.H9 v1(55.85,40.33) ; U1.H9 55.52,40.01 v1(55.2,40.34) ; v1(55.85,40.33) 56.17,40.66 U1.G10 ; v1(55.85,40.33) U1.G9 ; v1(55.85,40.33) U1.H10 v1(56.5,40.33) U1.G10 ; U1.F9 55.21,41.62 ; U1.F9 U1.G10 ; 55.21,41.62 U1.E8 ; 55.21,41.62 55.19,41.62 U1.F8 ; 30.02,69.85 30.25,69.85 v1(30.44,70.04) ; 30.02,69.85 v1(30.42,69.45) ; 30.02,69.85 DV05.2 ; RP37.1 35.2,32.3 v1(35.21,32.32) ; v1(53.9,40.34) U1.H7 v1(54.55,40.34) ; v1(53.9,40.34) U1.H6 U1.J6 ; CP30.2 v1(36.11,27.37) ; 60.99,66.03 60.99,65.97 60.79,65.78 v1(60.79,65.51) ; 60.99,66.03 D88.2 ; 60.99,66.03 61.42,65.6 v1(61.42,65.51) ; v1(22.3,71.09) 22.3,71.09 JV01.5 ; v1(66.82,65.64) 66.61,65.85 D86.2 ; v1(23.57,44.25) 23.39,44.06 CP9.2 ; U1.A15 59.48,44.56 60.01,45.09 v1(60.01,45.13) ; CC36.1 65.8,65.92 v1(66.11,65.61) ; U1.L8 55.09,37.84 v1(55.09,37.63) 55.09,37.17 55.11,37.15 55.13,37.15 U1.N9 ; U1.A1 50.06,44.82 v1(50.01,44.82) ; v1(59.86,35.11) 59.51,35.46 U1.R15 ; v1(54.55,40.34) U1.G8 ; D87.2 63.2,66.13 ; 63.2,66.13 v1(62.71,65.64) ; 63.2,66.13 63.2,66.01 v1(63.57,65.64) ; U1.E3 52.02,41.57 v1(52.02,41.02) ; 20.8,74.83 JV01.2 20.8,71.09 v1(20.8,71.09) ; D89.2 v1(59.88,65.5) ; v1(55.2,40.34) U1.G9 ; v1(55.2,40.34) U1.G8 ; 45.06,7.63 45.2,7.77 JV04.1 ; v1(51.95,36.43) 51.63,36.11 U1.P3 ; 32.34,69.85 v1(32.69,70.21) ; 32.34,69.85 32.38,69.85 v1(32.65,69.59) ; 32.34,69.85 DV06.2 ; v1(58.45,42.29) 58.12,41.96 U1.E13 ; v1(49.99,34.98) 50.33,35.32 U1.R1 ; CP13.1 v1(13.96,46.33) ; 23.8,74.99 JV01.8 23.8,71.09 v1(23.8,71.09) ; D84.2 v1(69.61,65.62) ; 68.61,66.12 D85.2 ; 68.61,66.12 v1(68.61,65.11) ; 68.61,66.12 v1(68.17,65.69) ; CP33.2 23.54,46.6 v1(23.56,46.62) ; v1(23.56,45.36) 23.55,45.34 CP8.2 ; v1(28.67,74.84) 28.3,74.47 JV01.17 v1(28.3,71.09) ; U1.G9 U1.F10 ; U1.K3 51.84,38.49 52.49,38.49 U1.L5 ; CP34.2 22.96,47.48 v1(23.21,47.24) ; U1.D11 56.82,42.61 v1(56.5,42.94) ; CV02.2 v1(36.9,72.04) ; v1(25.3,71.09) JV01.11 25.3,74.84 25.17,74.97 ; UC1.2 v1(69.19,58.63) ; v1(37.98,29.99) 37.35,29.36 UP6.2 ; U1.H13 v1(57.79,39.67) ; DV03.2 v1(36.84,71.12)
  TOP w0.305: UD1.M9 58.68,29.6 58.68,30.15 58.75,30.22 v1(58.75,30.25) ; v1(54.99,31.44) 54.7,31.15 UD1.G9 ; U1.L13 58.12,38.06 v1(57.79,38.39) 57.47,38.7 U1.K12 ; v1(62.43,23.18) 62.35,23.18 62.34,23.18 UD1.T1 ; UD1.F9 53.9,30.04 v1(53.78,30.16) ; UD1.J2 v1(56.7,24.38) ; UD1.G1 v1(55.08,22.81)
  TOP w0.356: v1(52.69,29.19) 52.3,28.81 UD1.D8 ; UD1.G9 UD1.G8
  TOP w0.381: v1(50.7,30.89) 50.7,30.5 50.7,30.5 UD1.B9 ; v1(17.13,15.15) 17.09,15.15 16.96,15.28 C5.1 ; v1(10.84,68.74) 10.84,68.74 DA02.2 10.84,68.15 v1(10.84,68.74) ; v1(10.84,68.74) 10.84,68.75 10.84,67.76 v1(11,67.6) ; v1(30.48,27.47) 30.48,27.47 30.02,27.47 29.84,27.29 CP28.2 29.52,26.86 v1(29.23,26.86) 29.19,26.89 CP27.2 ; 43.15,36.76 43.07,36.84 YC1.4 ; 43.15,36.76 43.05,36.65 43.05,32.26 43.37,31.94 CC12.2 v1(47.09,31.94) ; 43.15,36.76 42.54,36.76 v1(42.52,36.78) 42.24,36.78 41.97,37.05 41.97,40.82 42.35,41.2 43.99,41.2 44.77,40.42 YC1.2 45.06,40.37 CC11.2 ; 43.15,36.76 v1(43.84,36.76) 43.89,36.71 v1(45.41,36.71) 46.03,36.71 CC13.2 v1(46.2,37.06) CC10.2 ; DW1.2 14.01,12.74 v1(14.36,12.38) ; UD1.P1 60.3,22.61 v1(60.32,22.59) ; v1(55.91,29.18) UD1.J8 ; 58.69,22.34 v1(58.69,22.35) 58.7,22.35 58.7,23.18 UD1.M1 ; DV10.2 69.98,11.63 v1(69.98,11.63) ; C4.1 14.61,13.31 v1(14.97,12.95) ; 14.43,31.52 14.43,31.54 15.48,32.6 v1(16.15,32.6) ; 14.43,31.52 UW1.14 v1(15.53,30.78) ; 14.43,31.52 v1(15.2,32.29) ; CP26.2 v1(30.25,33.83) ; v1(31.2,30.04) 31.2,29.83 30.86,29.5 UP5.2 ; UD1.E2 53.12,23.98 53.48,23.63 v1(53.49,23.62) ; DV12.2 73.63,11.3 v1(73.47,11.14) ; RP34.1 v1(28.75,33.84) ; CV10.2 54.48,12.95 v1(54.49,12.96) ; CD9.1 v1(58.04,20.51) ; CV06.2 v1(35.05,14.48) ; UD1.T9 61.9,29.87 v1(62.29,30.26) ; v1(71.56,11.1) 71.57,11.11 DV11.2 ; v1(48.05,63.02) 48.05,62.99 ; v1(20.19,17.21) 20.69,17.21 21.07,17.59 UW1.4 ; UD1.P9 60.35,29.63 60.35,31.37 v1(60.49,31.51) ; v1(13.59,68.7) 13.61,68.68 DA03.2 13.61,67.99 v1(13.25,67.62) ; DV09.2 v1(72.6,11.17) ; v1(21.54,70.25) 21.54,70.25 DV07.8 DV07.3 21.54,68.07 v1(21.54,68.07) ; CV07.2 v1(39.24,14.49) ; v1(50.7,22.67) UD1.B1 ; CV11.2 56.36,12.95 v1(56.34,12.97) ; CD8.1 v1(58.03,19.59) ; UD1.B3 v1(50.3,25.18) ; v1(52.65,23.57) 52.3,23.22 UD1.D1 ; v1(24.54,68.07) 24.56,68.09 DV08.3 DV08.8 24.56,70.25 v1(24.56,70.25) ; v1(52.66,22.72) 53.1,23.16 UD1.E1 ; v1(17.78,15.09) 17.96,15.09 18.16,15.28 C123.1 ; v1(52.69,29.19) UD1.E8 ; UW1.1 v1(13.93,20.14) ; DC1.2 v1(34.49,19.94) ; CD13.1 v1(61.01,21.25) ; C1.1 v1(22.52,32.2) ; D83.2 v1(71.6,65.56) ; CV05.2 v1(38.18,18.63) ; v1(49.9,30.08) UD1.A9
  TOP w0.47: 76.31,65.28 JC4.4 ; JC4.4 76.31,66.86 ; JC4.4 75.52,66.07 ; JC4.4 77.1,66.07 ; JU01.6 39.25,74.75 ; JU01.6 37.68,74.75 ; JU01.6 38.46,73.45 ; JU01.6 38.46,76.05 ; JU01.8 39.25,80.75 ; JU01.8 38.46,79.45 ; JU01.8 37.68,80.75 ; JV01.23 17.55,80.99 ; JV01.23 16.61,79.41 ; JV01.23 17.55,77.83 ; JV01.23 18.49,79.41 ; 76.39,40.07 JC1.3 ; JC1.3 76.39,41.95 ; JC1.3 75.45,41.01 ; JC1.3 77.33,41.01 ; JV01.22 32.05,80.99 ; JV01.22 32.99,79.41 ; JV01.22 31.11,79.41 ; JV01.22 32.05,77.83 ; CP2.2 12.54,39.57 ; CP2.2 10.66,39.57 ; CP2.2 11.6,38.63 ; CP2.2 11.6,40.51 ; 4.28,25.93 JP1.5 ; JP1.5 5.73,26.87 ; JP1.5 4.28,27.81 ; JP1.5 2.83,26.87 ; JU01.7 52.04,80.75 ; JU01.7 50.46,80.75 ; JU01.7 51.25,79.45 ; JC5.1 77.23,72.48 ; JC5.1 75.35,72.48 ; JC5.1 76.29,71.54 ; JC5.1 76.29,73.42 ; JU01.5 52.04,74.75 ; JU01.5 50.46,74.75 ; JU01.5 51.25,76.05 ; JU01.5 51.25,73.45 ; 74.68,55 TH2.1 ; TH2.1 77.4,52.28 ; TH2.1 77.4,57.71 ; JV01.20 32.99,73.45 ; JV01.20 32.05,75.28 ; JV01.20 31.11,73.45 ; TH1.1 20,5.32 ; TH1.1 17.28,2.6 ; TH1.1 22.72,2.6 ; 2.83,37.03 JP1.1 ; JP1.1 4.28,37.97 ; JP1.1 4.28,36.09 ; JP1.1 5.73,37.03 ; 16.61,73.45 JV01.21 ; JV01.21 17.55,71.62 ; JV01.21 18.49,73.45 ; JV01.21 17.55,75.28
  TOP w0.508: v1(40.7,41.74) 39.95,40.98 UM1.4 40.23,40.63 v1(40.66,41.07) ; RD3.1 v1(55.88,19.65) ; CD2.1 v1(51.47,21.34) ; K1.1 9.85,63.39 RA11.2
  GND w0.47: JV01.23 17.55,80.99 ; JV01.23 16.61,79.41 ; JV01.23 18.49,79.41 ; JV01.23 17.55,77.83 ; 31.11,79.41 JV01.22 ; JV01.22 32.99,79.41 ; JV01.22 32.05,77.83 ; JV01.22 32.05,80.99 ; 17.55,71.62 JV01.21 ; JV01.21 17.55,75.28 ; JV01.21 16.61,73.45 ; JV01.21 18.49,73.45 ; 50.46,74.75 JU01.5 ; JU01.5 52.04,74.75 ; JU01.5 51.25,76.05 ; JU01.5 51.25,73.45 ; K1.3 8.35,67.6 ; K1.3 8.35,65.72 ; K1.3 9.29,66.66 ; K1.3 7.41,66.66 ; 9.85,63.87 K1.1 ; K1.1 9.85,65.75 ; K1.1 8.91,64.81 ; K1.1 10.79,64.81 ; JP1.5 4.28,27.81 ; JP1.5 2.83,26.87 ; JP1.5 5.73,26.87 ; JP1.5 4.28,25.93 ; 11.6,38.63 CP2.2 ; CP2.2 11.6,40.51 ; CP2.2 10.66,39.57 ; CP2.2 12.54,39.57 ; 4.28,36.09 JP1.1 ; JP1.1 2.83,37.03 ; JP1.1 5.73,37.03 ; JP1.1 4.28,37.97 ; JC5.1 77.23,72.48 ; JC5.1 76.29,73.42 ; JC5.1 76.29,71.54 ; JC5.1 75.35,72.48 ; JC1.3 76.39,41.95 ; JC1.3 75.45,41.01 ; JC1.3 77.33,41.01 ; JC1.3 76.39,40.07 ; 31.11,73.45 JV01.20 ; JV01.20 32.05,75.28 ; JV01.20 32.99,73.45 ; JV01.20 32.05,71.62 ; 38.46,79.45 JU01.8 ; JU01.8 37.68,80.75 ; JU01.8 39.25,80.75 ; 50.46,80.75 JU01.7 ; JU01.7 52.04,80.75 ; JU01.7 51.25,79.45 ; TH1.1 22.72,2.6 ; TH1.1 20,5.32 ; TH1.1 17.28,2.6 ; JC4.4 77.1,66.07 ; JC4.4 75.52,66.07 ; JC4.4 76.31,66.86 ; JC4.4 76.31,65.28 ; CP10.2 20.88,61.28 ; CP10.2 19.94,62.22 ; CP10.2 19.94,60.34 ; CP10.2 19,61.28 ; 77.4,52.28 TH2.1 ; TH2.1 74.68,55 ; TH2.1 77.4,57.71 ; JU01.6 38.46,76.05 ; JU01.6 37.68,74.75 ; JU01.6 38.46,73.45 ; JU01.6 39.25,74.75
  VDD w0.127: 67.12,65.08 v1(67.47,65.42)
  VDD w0.254: v1(69.61,65.62) v1(69.61,64.99)
  VDD w0.47: 74.68,55 TH2.1 ; TH2.1 77.4,52.28 ; TH2.1 77.4,57.71 ; JU01.5 51.25,76.05 ; JU01.5 51.25,73.45 ; JU01.5 52.04,74.75 ; JU01.5 50.46,74.75 ; CP10.2 19.94,62.22 ; CP10.2 20.88,61.28 ; CP10.2 19.94,60.34 ; CP10.2 19,61.28 ; 37.68,80.75 JU01.8 ; JU01.8 39.25,80.75 ; JU01.8 38.46,79.45 ; JV01.21 18.49,73.45 ; JV01.21 17.55,71.62 ; JV01.21 17.55,75.28 ; JV01.21 16.61,73.45 ; 7.41,66.66 K1.3 ; K1.3 8.35,65.72 ; K1.3 9.29,66.66 ; K1.3 8.35,67.6 ; 2.83,26.87 JP1.5 ; JP1.5 4.28,27.81 ; JP1.5 5.73,26.87 ; JP1.5 4.28,25.93 ; JC5.1 77.23,72.48 ; JC5.1 75.35,72.48 ; JC5.1 76.29,73.42 ; JC5.1 76.29,71.54 ; 11.6,38.63 CP2.2 ; CP2.2 10.66,39.57 ; CP2.2 11.6,40.51 ; CP2.2 12.54,39.57 ; JC1.3 77.33,41.01 ; JC1.3 76.39,41.95 ; JC1.3 75.45,41.01 ; JC1.3 76.39,40.07 ; 32.05,77.83 JV01.22 ; JV01.22 31.11,79.41 ; JV01.22 32.05,80.99 ; JV01.22 32.99,79.41 ; JV01.23 18.49,79.41 ; JV01.23 16.61,79.41 ; JV01.23 17.55,77.83 ; JV01.23 17.55,80.99 ; K1.1 10.79,64.81 ; K1.1 8.91,64.81 ; K1.1 9.85,63.87 ; K1.1 9.85,65.75 ; 76.31,65.28 JC4.4 ; JC4.4 77.1,66.07 ; JC4.4 75.52,66.07 ; JC4.4 76.31,66.86 ; 32.05,71.62 JV01.20 ; JV01.20 31.11,73.45 ; JV01.20 32.05,75.28 ; JV01.20 32.99,73.45 ; 2.83,37.03 JP1.1 ; JP1.1 4.28,36.09 ; JP1.1 5.73,37.03 ; JP1.1 4.28,37.97 ; JU01.6 39.25,74.75 ; JU01.6 37.68,74.75 ; JU01.6 38.46,76.05 ; JU01.6 38.46,73.45 ; JU01.7 52.04,80.75 ; JU01.7 51.25,79.45 ; JU01.7 50.46,80.75 ; TH1.1 20,5.32 ; TH1.1 22.72,2.6 ; TH1.1 17.28,2.6
  BOTTOM w0.254: CC35.1 56.48,40.35 v1(56.5,40.33) ; CC14.2 60.63,40.91 60.63,41.27 CC6.1
  BOTTOM w0.305: CD14.1 62.29,30.26 62.29,30.26 v1(62.29,30.26) ; v1(49.9,30.08) 49.88,30.06 CD5.1 ; CD10.1 56.66,24.42 v1(56.7,24.38) ; v1(52.69,29.19) 52.83,29.05 CD12.1 ; v1(57.58,26.51) RD5.1 ; CD11.1 50.79,22.77 v1(50.7,22.67)
  BOTTOM w0.381: CC9.2 50.6,45.16 CC24.1 ; CC9.2 49.97,45.06 ; CC9.2 CC22.1 ; v1(48.92,38.28) 48.54,37.91 CC28.2 48.41,37.88 v1(47.49,36.96) ; v1(16.76,33.33) v1(17.14,33.71) ; CD6.1 62.55,39.38 62.88,39.7 v1(62.88,40.12) 62.73,40.26 CC5.1 ; 49.94,42.83 49.85,42.74 49.31,42.74 49.35,42.7 ; 49.94,42.83 49.94,42.29 CC1.1 49.91,42.14 49.35,42.7 ; 49.94,42.83 CC7.2 ; v1(49.99,34.98) 50.31,35.31 CD17.1 ; v1(62.43,23.18) 62.31,23.3 CD16.1 ; CD4.1 54.03,40.2 v1(53.9,40.34) 53.89,40.33 CC29.2 ; v1(53.71,48.17) 53.71,48.52 v1(53.54,48.7) ; v1(60.01,45.13) 60.17,44.97 CC2.1 ; v1(49.07,40.59) 49.05,40.57 CC30.2 ; 49.97,45.06 49.74,45.28 v1(49.7,45.28) ; 49.97,45.06 50.01,45.01 v1(50.01,44.82) ; v1(60.67,42.92) 60.67,42.65 CC3.1 CC6.1 60.52,41.53 v1(60.91,41.15) 60.4,40.64 CC14.2 ; CD15.1 53.87,34.09 v1(53.83,34.05) ; RD1.1 60.41,39.68 v1(60.53,39.56) ; CC21.1 53.68,41.25 53.42,40.99 v1(53.9,40.99) ; 49.35,42.7 v1(49.35,42.65) 49.15,42.65 49.04,42.55 CC26.1 ; CC25.1 51.87,41.37 51.97,41.27 ; 51.97,41.27 52.02,41.23 v1(52.02,41.02) ; 51.97,41.27 CC27.2
  BOTTOM w0.47: 76.29,71.54 JC5.1 ; JC5.1 76.29,73.42 ; JC5.1 77.23,72.48 ; JC5.1 75.35,72.48 ; JV01.20 32.05,75.28 ; JV01.20 32.05,71.62 ; JV01.20 32.99,73.45 ; JV01.20 31.11,73.45 ; JC1.3 76.39,41.95 ; JC1.3 75.45,41.01 ; JC1.3 76.39,40.07 ; JC1.3 77.33,41.01 ; 17.28,2.6 TH1.1 ; TH1.1 20,5.32 ; TH1.1 22.72,2.6 ; JP1.1 4.28,37.97 ; JP1.1 5.73,37.03 ; JP1.1 4.28,36.09 ; JP1.1 2.83,37.03 ; 17.55,77.83 JV01.23 ; JV01.23 18.49,79.41 ; JV01.23 16.61,79.41 ; JV01.23 17.55,80.99 ; 8.35,65.72 K1.3 ; K1.3 9.29,66.66 ; K1.3 8.35,67.6 ; K1.3 7.41,66.66 ; JC4.4 77.1,66.07 ; JC4.4 76.31,66.86 ; JC4.4 75.52,66.07 ; JC4.4 76.31,65.28 ; JV01.21 17.55,75.28 ; JV01.21 17.55,71.62 ; JV01.21 16.61,73.45 ; JV01.21 18.49,73.45 ; 77.4,52.28 TH2.1 ; TH2.1 77.4,57.71 ; TH2.1 74.68,55 ; 8.91,64.81 K1.1 ; K1.1 10.79,64.81 ; K1.1 9.85,63.87 ; 31.11,79.41 JV01.22 ; JV01.22 32.05,77.83 ; JV01.22 32.99,79.41 ; JV01.22 32.05,80.99 ; 4.28,25.93 JP1.5 ; JP1.5 2.83,26.87 ; JP1.5 5.73,26.87 ; JP1.5 4.28,27.81 ; JU01.5 51.25,76.05 ; JU01.5 50.46,74.75 ; JU01.5 51.25,73.45 ; JU01.5 52.04,74.75 ; CP10.2 20.88,61.28 ; CP10.2 19,61.28 ; CP10.2 19.94,62.22 ; CP10.2 19.94,60.34 ; JU01.6 38.46,76.05 ; JU01.6 38.46,73.45 ; JU01.6 39.25,74.75 ; JU01.6 37.68,74.75 ; JU01.8 39.25,80.75 ; JU01.8 38.46,79.45 ; JU01.8 37.68,80.75 ; JU01.7 52.04,80.75 ; JU01.7 50.46,80.75 ; JU01.7 51.25,79.45 ; CP2.2 12.54,39.57 ; CP2.2 10.66,39.57 ; CP2.2 11.6,40.51 ; CP2.2 11.6,38.63
  BOTTOM w0.508: v1(59.86,35.11) 59.83,35.14 CD1.1
  vias: v1(1.25,32.34) v1(1.3,18.45) v1(1.3,12.88) v1(1.4,26.9) v1(1.5,78.26) v1(1.54,22.87) v1(1.54,3.22) v1(1.63,46.09) v1(1.58,36.72) v1(1.65,41.52) v1(1.7,7.56) v1(1.82,64.31) v1(1.89,72.04) v1(2,50.75) v1(2.07,67.68) v1(2.05,54.85) v1(2.21,59.18) v1(2.39,80.68) v1(2.81,1.07) v1(4.18,41.17) v1(4.44,45.29) v1(5,4.47) v1(5.59,13.6) v1(6.17,20.84) v1(6.65,1.11) v1(7.25,28.08) v1(7.71,38.77) v1(8.23,41.13) v1(8.5,44.29) v1(8.82,9.35) v1(8.88,81.19) v1(8.89,7.22) v1(9.69,5.72) v1(10.02,11.23) v1(10.13,9.58) v1(10.08,8.86) v1(10.21,8.08) v1(10.42,10.28) v1(10.4,7.23) v1(10.69,43.59) v1(10.92,0.98) v1(11,12.23) v1(11.07,13.73) v1(11.35,6.59) v1(11.45,10.46) v1(11.73,17.36) v1(11.66,15.63) v1(11.77,19.1) v1(11.91,11.38) v1(11.9,7.2) v1(12,12.43) v1(12.34,13.35) v1(12.41,46.36) v1(12.48,58.73) v1(12.46,47.31) v1(12.61,42.62) v1(12.66,6.6) v1(12.85,48.34) v1(12.83,18.88) v1(12.77,17.65) v1(12.82,16.78) v1(12.78,16.1) v1(12.78,15.4) v1(12.88,49.19) v1(12.91,13.86) v1(13.01,42.02) v1(12.99,20.12) v1(12.95,14.53) v1(13.11,55.23) v1(13.18,43.51) v1(13.19,21.49) v1(13.25,5.25) v1(13.4,7.24) v1(13.49,49.18) v1(13.47,48.34) v1(13.69,40.15) v1(13.65,14.89) v1(13.76,44.13) v1(13.76,23.98) v1(13.84,16.84) v1(13.8,16.16) v1(13.89,62.17) v1(13.95,45.35) v1(14.11,28.03) v1(14.09,11.35) v1(14.09,10.48) v1(14.23,20.78) v1(14.28,65.24) v1(14.42,15.52) v1(14.44,6.59) v1(14.49,38.66) v1(14.72,80.46) v1(14.7,39.94) v1(14.72,21.76) v1(14.72,20.13) v1(14.72,11.88) v1(14.76,44.12) v1(14.92,64.23) v1(15.02,16.13) v1(15.12,20.91) v1(15.06,16.81) v1(15.14,10.33) v1(15.17,39.05) v1(15.22,0.83) v1(15.31,45.33) v1(15.41,14.06) v1(15.52,20.37) v1(15.51,9.29) v1(15.65,49.2) v1(15.57,45.93) v1(15.63,11.21) v1(15.6,7.79) v1(15.72,70.48) v1(15.69,44.02) v1(15.83,63.34) v1(15.78,61.65) v1(15.81,13.33) v1(15.9,43.39) v1(15.92,12.42) v1(15.95,20.9) v1(16.03,14.67) v1(16.06,26.23) v1(16.13,5.37) v1(16.19,46.24) v1(16.17,45.67) v1(16.24,10.05) v1(16.29,38.57) v1(16.4,20.4) v1(16.49,8.7) v1(16.67,14.65) v1(16.76,44.22) v1(16.79,21.76) v1(16.84,6.7) v1(16.87,45.93) v1(16.91,20.78) v1(17.02,38.56) v1(16.96,10.84) v1(17.06,15.97) v1(17.25,43.7) v1(17.33,45.38) v1(17.29,39.12) v1(17.31,20.13) v1(17.31,17.29) v1(17.32,9.45) v1(17.32,7.59) v1(17.41,18.09) v1(17.43,14.08) v1(17.41,13.23) v1(17.37,12.56) v1(17.37,11.85) v1(17.48,19.04) v1(17.48,16.64) v1(17.94,45.94) v1(17.87,44.21) v1(17.99,70.48) v1(18.02,20.5) v1(17.98,13.4) v1(18.13,21.36) v1(18.15,17.2) v1(18.11,16.52) v1(18.11,15.82) v1(18.09,8.33) v1(18.19,34.53) v1(18.32,43.7) v1(18.33,9.82) v1(18.33,9.11) v1(18.38,67.51) v1(18.42,45.41) v1(18.39,12.85) v1(18.35,12.17) v1(18.35,11.47) v1(18.37,10.69) v1(18.6,14.54) v1(18.83,44.24) v1(18.93,45.94) v1(18.89,5.88) v1(18.98,70.2) v1(19.01,28.97) v1(19,22.03) v1(19.04,20.47) v1(18.97,13.59) v1(18.99,8.41) v1(19.13,70.76) v1(19.13,9.63) v1(19.24,67.51) v1(19.18,62.54) v1(19.16,14.5) v1(19.16,10.63) v1(19.29,12.67) v1(19.29,11.81) v1(19.45,45.38) v1(19.4,7.38) v1(19.48,43.7) v1(19.61,70.17) v1(19.58,69.51) v1(19.72,81.09) v1(19.74,70.76) v1(19.81,34.9) v1(19.81,21.27) v1(19.77,16.52) v1(19.8,14.11) v1(19.83,11.23) v1(19.94,45.95) v1(19.94,44.24) v1(19.91,33.63) v1(19.88,13.38) v1(20.02,19.46) v1(20.2,20.37) v1(20.19,15.81) v1(20.26,67.08) v1(20.52,12.25) v1(20.75,7.15) v1(20.76,46.2) v1(20.76,45.44) v1(20.77,44.23) v1(20.78,43.5) v1(20.78,15.23) v1(20.79,10.73) v1(20.88,11.69) v1(21,16.45) v1(21.21,20.33) v1(21.33,22.66) v1(21.33,5.98) v1(21.38,35.6) v1(21.42,14.73) v1(21.55,46.04) v1(21.54,45.4) v1(21.56,44.22) v1(21.55,43.62) v1(21.74,15.75) v1(21.9,19.82) v1(22.02,46.59) v1(22.03,14.18) v1(22.14,34.67) v1(22.15,26.18) v1(22.08,18.85) v1(22.05,17.96) v1(22.08,7.13) v1(22.19,45.4) v1(22.21,44.23) v1(22.2,43.65) v1(22.44,48.69) v1(22.44,47.24) v1(22.4,16.82) v1(22.4,13.58) v1(22.51,64.57) v1(22.47,45.97) v1(22.7,15.33) v1(22.82,49.07) v1(22.77,28.93) v1(22.8,12.96) v1(22.84,12.14) v1(22.88,14.41) v1(22.9,10.76) v1(23.23,59.22) v1(23.21,58.54) v1(23.24,45.96) v1(23.26,59.99) v1(23.35,11.46) v1(23.33,0.98) v1(23.42,36.93) v1(23.44,7.24) v1(23.49,5.72) v1(23.64,42.27) v1(23.57,40.34) v1(23.64,13.35) v1(23.66,38.13) v1(23.67,10.71) v1(23.85,35.44) v1(24.05,59.02) v1(24.29,58.39) v1(24.29,12.37) v1(24.28,10.36) v1(24.43,40.32) v1(24.37,38.12) v1(24.35,8.91) v1(24.5,42.25) v1(24.65,31.78) v1(24.7,7.41) v1(24.82,11.28) v1(24.92,55.3) v1(25,59.61) v1(25.04,6.15) v1(25.17,42.22) v1(25.18,41.62) v1(25.19,40.95) v1(25.19,40.28) v1(25.19,39.6) v1(25.18,38.86) v1(25.17,38.09) v1(25.24,37.06) v1(25.25,60.18) v1(25.25,9.88) v1(25.29,8.62) v1(25.76,81.02) v1(25.8,18.89) v1(26.56,67.56) v1(26.71,60.15) v1(26.77,58.43) v1(26.93,52.95) v1(26.85,24.19) v1(27.02,35.41) v1(27.1,49.68) v1(27.39,10.06) v1(27.6,59.18) v1(27.59,0.98) v1(27.71,60.21) v1(27.83,49.68) v1(28.11,48.03) v1(28.17,37.09) v1(28.39,27.44) v1(28.52,49.66) v1(28.57,58.4) v1(28.72,52.55) v1(28.8,47.6) v1(28.9,50.19) v1(28.9,49.05) v1(28.9,48.31) v1(29.15,39.91) v1(29.17,27.45) v1(29.26,49.63) v1(29.52,33.86) v1(29.6,14.72) v1(29.74,58.63) v1(29.66,47.53) v1(29.69,35.31) v1(29.83,67.26) v1(29.83,38.4) v1(30.09,59.53) v1(30.38,57.04) v1(30.44,28.04) v1(30.64,60.25) v1(30.59,58.49) v1(30.58,30.66) v1(30.57,30.05) v1(30.91,50.04) v1(30.93,49.25) v1(31.01,33.84) v1(31.07,41.78) v1(31.2,56.77) v1(31.17,30.64) v1(31.76,30.04) v1(31.88,40.79) v1(32,1.07) v1(32.06,33.86) v1(32.44,56.98) v1(32.37,30.03) v1(32.38,15.15) v1(32.53,49.1) v1(32.66,50.01) v1(32.83,39.15) v1(32.89,35.28) v1(33.04,49.53) v1(32.98,37.09) v1(33.43,57) v1(33.37,8.72) v1(33.74,45.05) v1(34.1,69.98) v1(34.37,56.1) v1(34.48,43.31) v1(34.46,35.5) v1(34.8,80.95) v1(34.88,68.97) v1(35.09,7.76) v1(35.34,27.19) v1(35.41,67.28) v1(35.37,19.11) v1(35.78,20.58) v1(35.91,51.67) v1(35.91,35.53) v1(36.15,28.04) v1(36.05,4.43) v1(36.17,44.46) v1(36.28,77.27) v1(36.31,18.29) v1(36.57,5.87) v1(36.75,60.43) v1(36.83,35.48) v1(36.87,1.07) v1(37.03,54.66) v1(37.24,44.47) v1(37.28,19.39) v1(37.5,35.04) v1(37.6,27.84) v1(37.75,45.17) v1(37.82,43.14) v1(38.23,44.47) v1(38.45,30.45) v1(38.82,45.18) v1(38.91,60.1) v1(38.91,53.53) v1(38.88,52.74) v1(38.9,43.15) v1(39.05,30.08) v1(38.96,4.5) v1(39.24,44.48) v1(39.29,46.48) v1(39.29,30.86) v1(39.31,6.01) v1(39.8,61.83) v1(39.81,45.18) v1(39.79,30.21) v1(39.94,10.05) v1(40.13,43.09) v1(40.14,35.3) v1(40.66,67.31) v1(41.14,69.75) v1(41.41,71.07) v1(41.5,60.43) v1(41.47,4.35) v1(41.8,52.73) v1(41.91,14.02) v1(42.23,71.04) v1(42.25,32.58) v1(42.3,6.16) v1(42.59,60.45) v1(42.57,52.73) v1(42.71,12.67) v1(42.95,70.33) v1(42.87,61.8) v1(43.05,41.23) v1(43.14,29.24) v1(43.51,69.9) v1(43.61,67.34) v1(44.04,61.78) v1(44.22,0.88) v1(44.42,4.55) v1(44.69,9.59) v1(44.8,5.99) v1(45.06,14.04) v1(45.1,12.6) v1(45.43,53.54) v1(45.46,52.71) v1(45.89,25.24) v1(46.35,71.5) v1(46.48,23.52) v1(46.63,70.36) v1(46.71,61.78) v1(46.84,55.99) v1(46.99,29.28) v1(47.02,25.28) v1(47.07,20.89) v1(47.19,4.26) v1(47.84,53.88) v1(47.92,6.13) v1(48.03,67.24) v1(47.95,36.08) v1(47.96,33.51) v1(48.1,60.15) v1(48.35,19.79) v1(48.43,9.42) v1(48.53,52.78) v1(48.51,51.3) v1(48.6,43.15) v1(48.67,18.32) v1(49.14,19.44) v1(49.2,54.1) v1(49.3,59.67) v1(49.28,45.67) v1(49.37,15.15) v1(50.11,51.48) v1(50.12,4.48) v1(50.26,37.97) v1(50.44,61.75) v1(50.47,67.36) v1(50.73,19.55) v1(50.76,48.17) v1(50.8,10.57) v1(50.84,6.61) v1(50.8,5.63) v1(51.01,18.3) v1(51.54,11.07) v1(51.5,6.6) v1(51.65,47.86) v1(51.81,67.34) v1(51.76,19.57) v1(51.86,15.16) v1(51.86,4.73) v1(52.19,1.02) v1(52.8,56.06) v1(53.03,61.04) v1(53.03,59.18) v1(53.46,4.23) v1(53.62,65.53) v1(53.68,18.19) v1(54,61.63) v1(54,19.03) v1(54.12,47.78) v1(54.4,46.18) v1(54.45,45.58) v1(54.4,14.29) v1(54.48,64.67) v1(54.55,45.01) v1(54.71,57.48) v1(54.9,79.66) v1(55.04,6.58) v1(55.06,7.63) v1(55.7,61.52) v1(55.77,4.61) v1(56.09,19) v1(56.28,70.51) v1(56.56,55.68) v1(56.69,18.23) v1(57.12,56.94) v1(57.35,61.95) v1(57.59,54.62) v1(57.87,57.76) v1(57.92,52.75) v1(57.99,79.05) v1(58.05,64.62) v1(58.12,19.01) v1(58.42,12.61) v1(58.53,6.23) v1(58.57,49.65) v1(58.68,58.56) v1(58.7,47.06) v1(58.7,46.45) v1(58.82,70.48) v1(59.08,53.09) v1(59.12,0.93) v1(59.2,60.15) v1(59.27,19.45) v1(59.48,52.14) v1(59.9,49.67) v1(60.17,64.63) v1(60.16,53.91) v1(60.53,49.67) v1(60.72,61.8) v1(60.78,35.03) v1(60.87,54.75) v1(61.02,19.47) v1(61.13,58.23) v1(61.08,15.25) v1(61.61,55.6) v1(61.72,18.29) v1(61.89,44.85) v1(61.94,35) v1(62,75.75) v1(62.19,49.53) v1(62.18,47.26) v1(62.33,4.86) v1(62.64,61.73) v1(62.89,56.67) v1(63.19,71.94) v1(63.47,19.6) v1(64.26,18.65) v1(64.5,20.43) v1(64.6,6.23) v1(65.14,21.69) v1(65.16,0.88) v1(65.43,34.05) v1(65.45,32.4) v1(65.44,24.56) v1(65.53,80.7) v1(65.48,31.16) v1(65.48,29.59) v1(65.48,27.93) v1(65.48,26.25) v1(65.49,23.09) v1(65.86,53.6) v1(66.19,34.3) v1(66.25,31.58) v1(66.24,28.67) v1(66.22,25.93) v1(66.21,20.29) v1(66.31,22.15) v1(67.07,12.63) v1(67.66,75.75) v1(67.94,52.63) v1(67.88,5.02) v1(67.96,67.91) v1(68.07,69.77) v1(68.07,46.89) v1(68.29,49.5) v1(68.29,48.66) v1(68.42,45.9) v1(68.41,43.92) v1(69.21,1.06) v1(69.31,14.82) v1(70.98,79.7) v1(71.03,70.31) v1(71.12,43.14) v1(71.76,1.1) v1(72.71,17.36) v1(72.8,20.02) v1(72.84,4.63) v1(72.89,38.77) v1(73,70.75) v1(74.14,79.67) v1(74.19,70.1) v1(74.49,5.8) v1(75.16,75.66) v1(76.27,1.57) v1(76.47,35.21) v1(76.48,24.72) v1(76.48,20.17) v1(76.58,22.63) v1(76.66,28.79) v1(77.23,15.61) v1(77.2,12.61) v1(77.71,79.77) v1(78.23,2.47) v1(78.45,6.89) v1(78.48,73.47) v1(78.53,65.2) v1(78.71,60.38) v1(78.83,46.63) v1(78.78,41.5) v1(78.79,5.05) v1(78.89,37.72) v1(79.03,15.78) v1(79.07,11.37) v1(79.24,31.39) v1(79.26,34.91) v1(79.25,27.72) v1(79.28,23.92) v1(79.26,20.98)
